# Allegro board PT8620_LTC2.brd
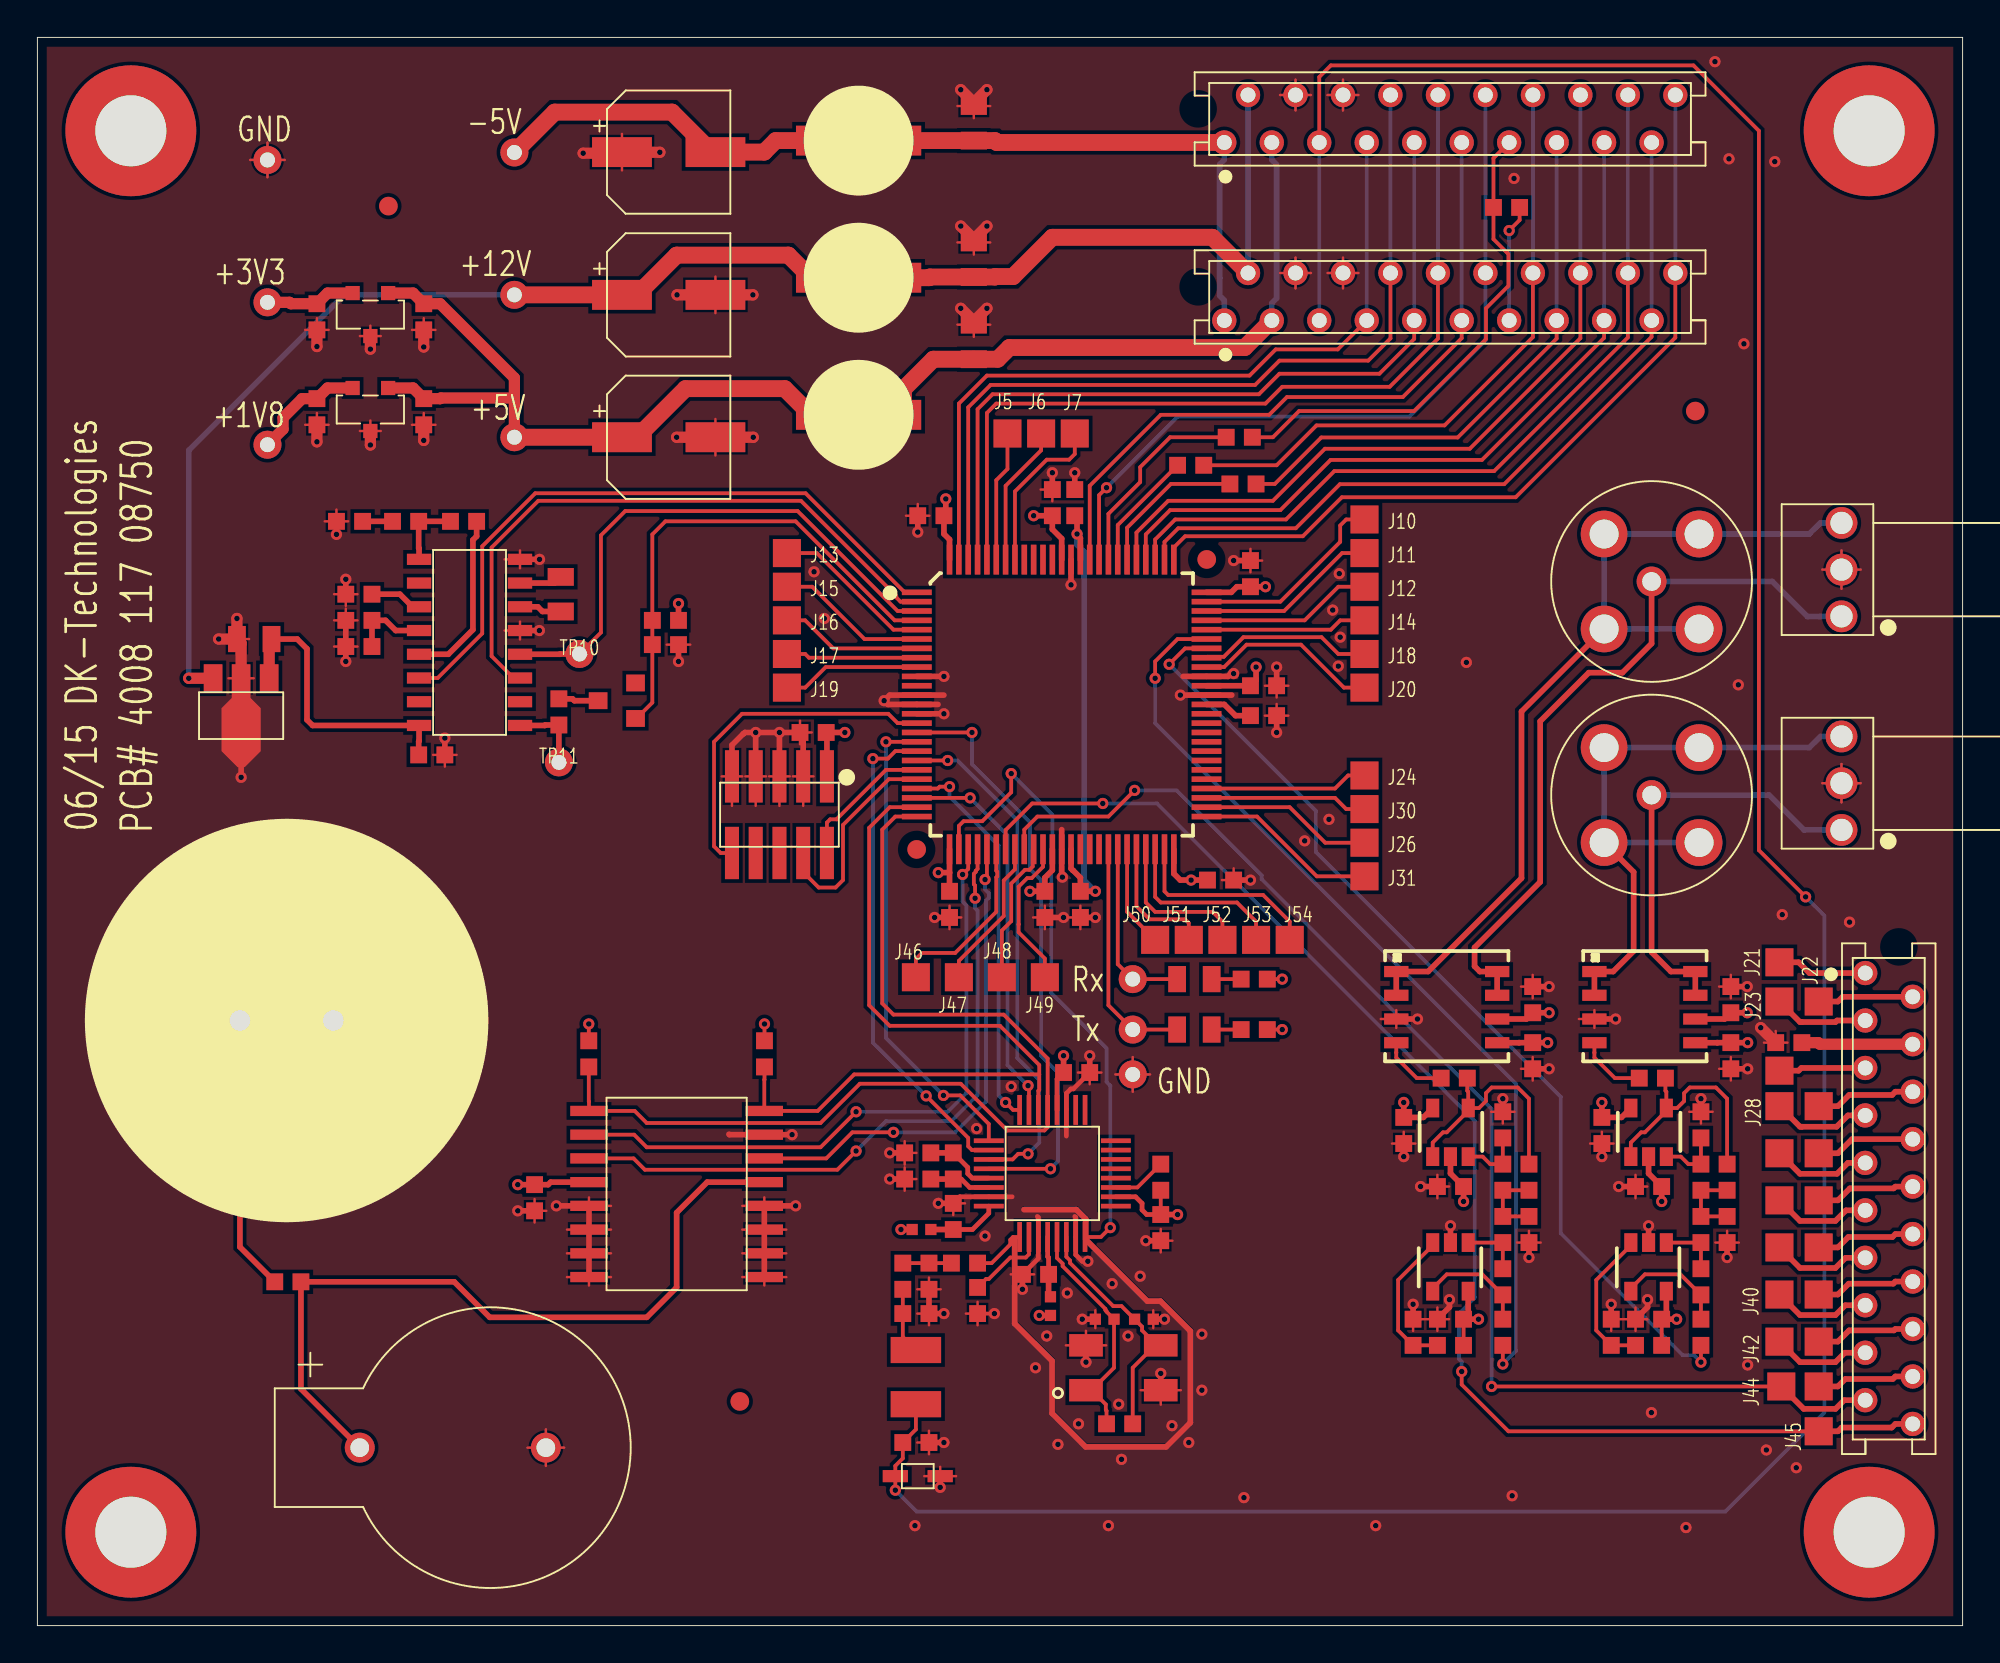
[diagram p0: board, top side]
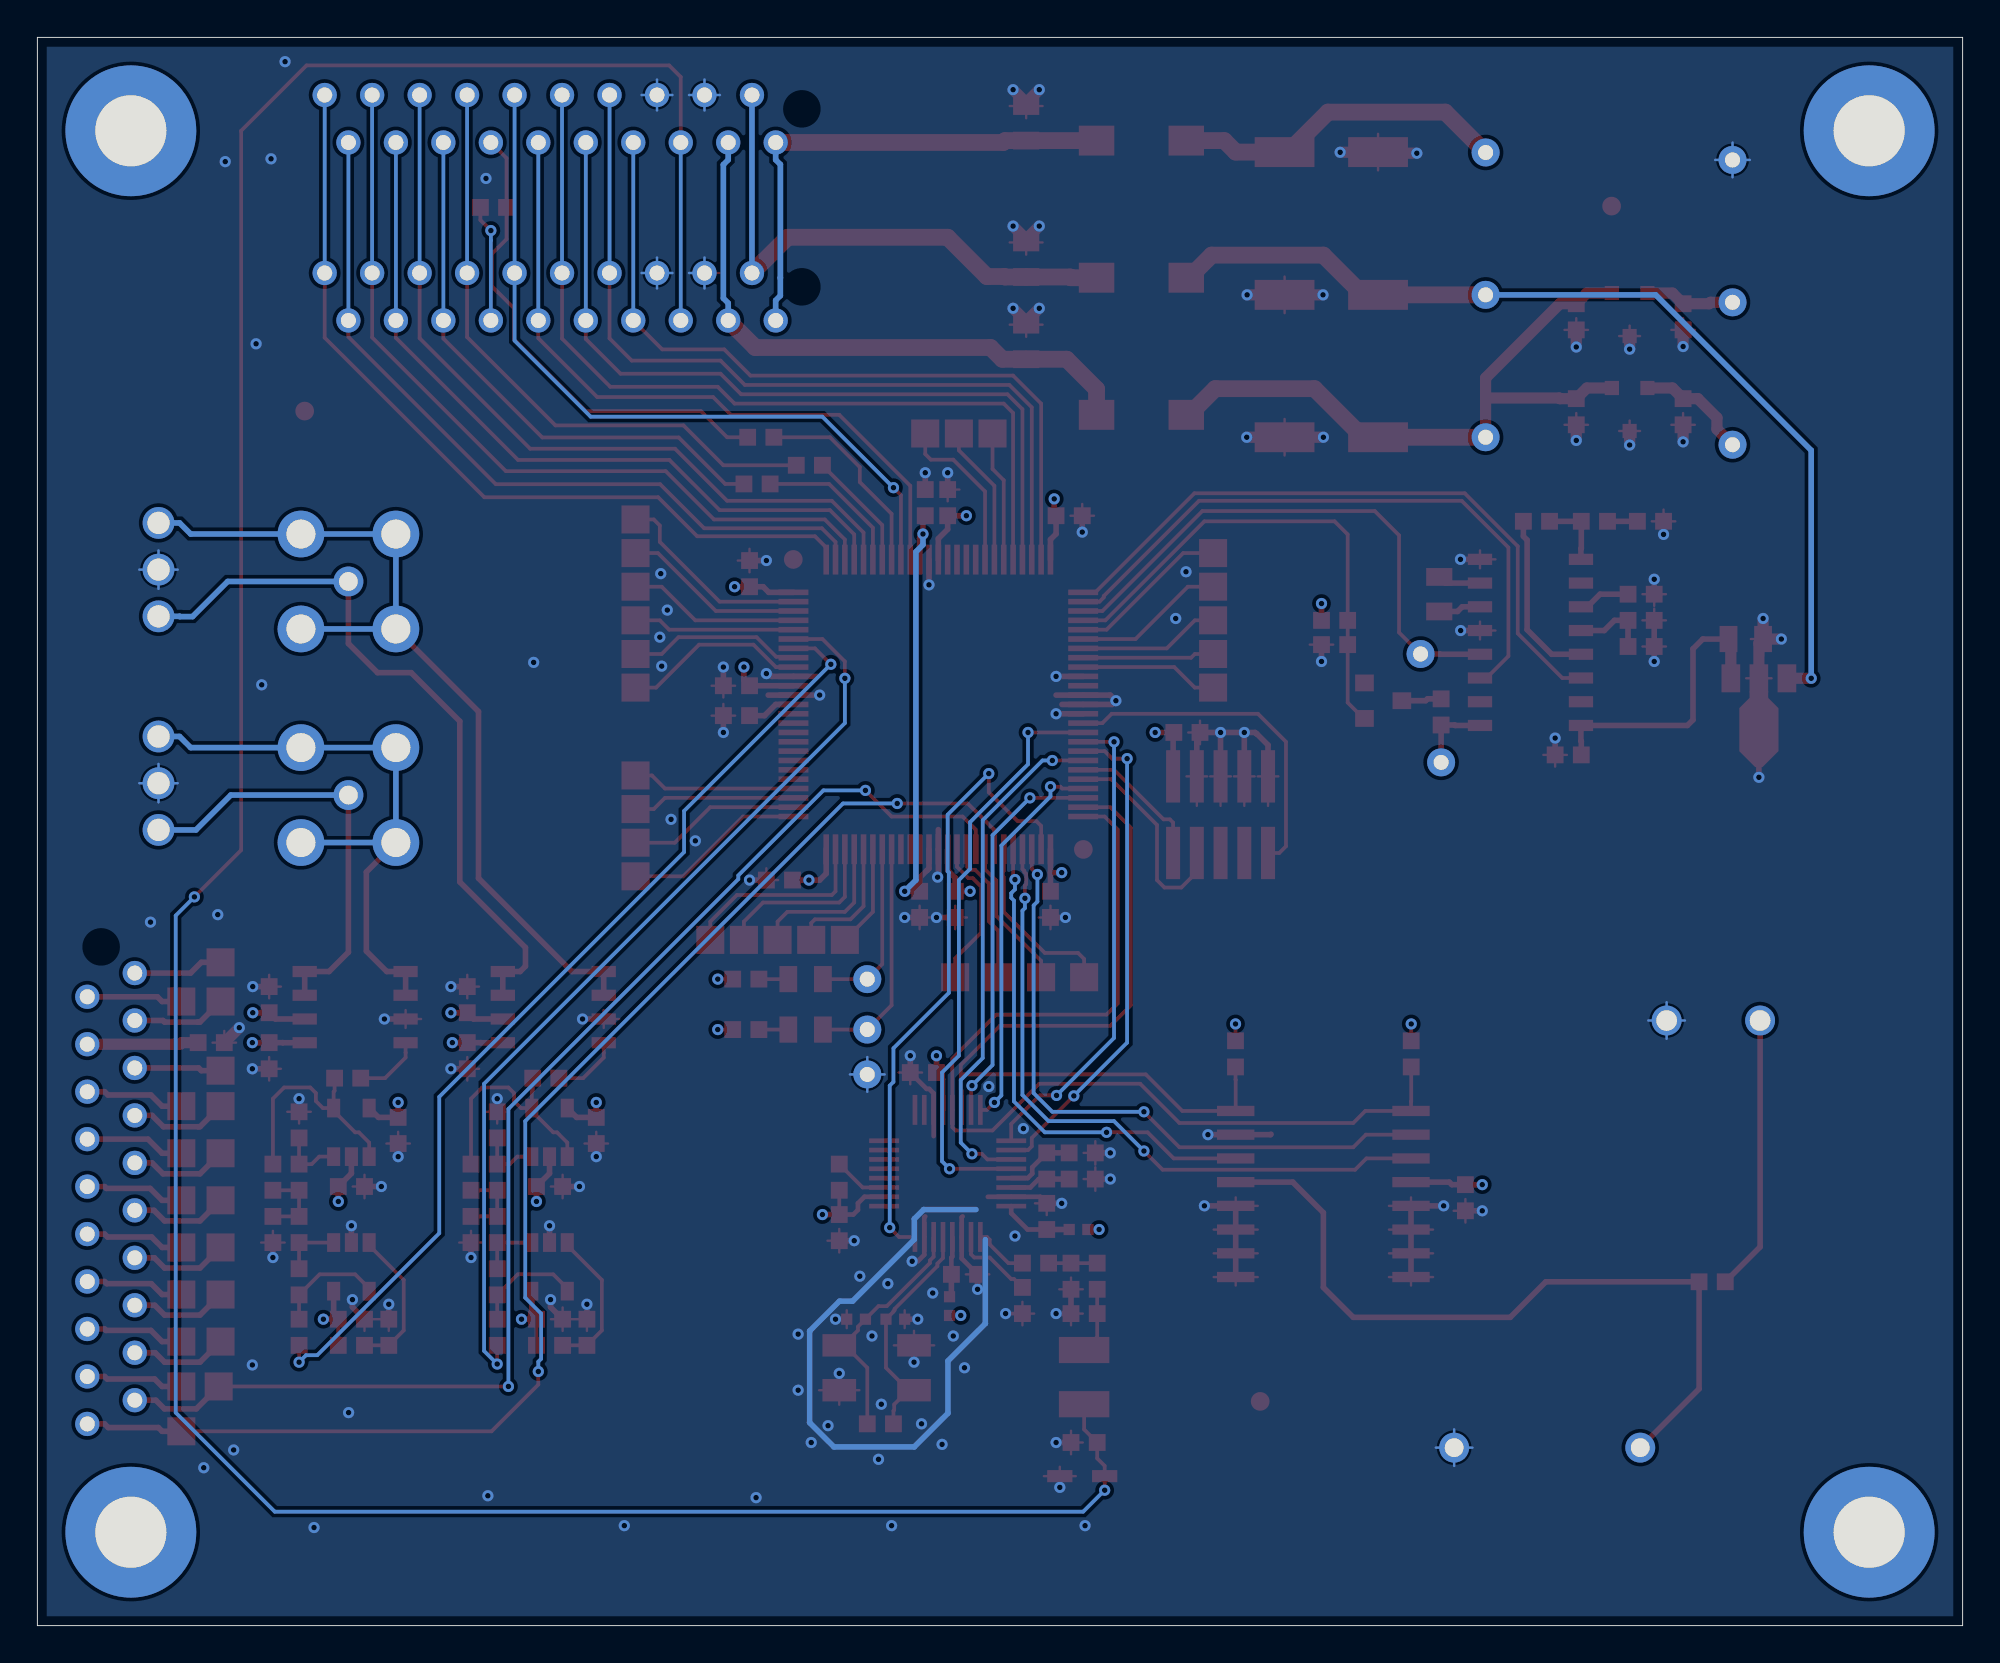
[diagram p1: board, bottom side, seen from below]

Outline 103 x 85 mm; copper layers: TOP, LAYER2, LAYER3, BOTTOM. Coordinates in mm from the lower left corner of the outline.
Outline path: 0,85 0,0 103,0 103,85 0,85

## Placement (name value [footprint] x y rotation side)
BT1  Batt Holder 12mm  [KEYSTONE500]  22.23 9.53 0 top
C1  1uF  [CC0603]  20.67 70.05 270 top
C2  1uF  [CC0603]  14.96 70.05 270 top
C3  1uF  [CC0603]  20.67 64.97 270 top
C4  1uF  [CC0603]  14.96 64.97 270 top
C5  100uF, 25V  [ECAP6X6_SIZED]  33.77 78.86 0 top
C6  100nF  [CC0805]  50.1 80.4 90 top
C7  100uF, 25V  [ECAP6X6_SIZED]  33.77 71.22 0 top
C8  100nF  [CC0805]  50.1 73.1 90 top
C9  100uF, 25V  [ECAP6X6_SIZED]  33.77 63.6 0 top
C10  100nF  [CC0805]  50.1 68.7 90 top
C11  1uF  [CC0603]  65.6 48.7 180 top
C12  1uF  [CC0603]  55.8 38.6 90 top
C13  100nF  [CC0603]  48.8 38.6 270 top
C14  100nF  [CC0603]  41.5 47.8 180 top
C15  100nF  [CC0603]  65.6 50.3 0 top
C16  100nF  [CC0603]  63.3 39.9 0 top
C17  100nF  [CC0603]  47.8 59.4 180 top
C18  100nF  [CC0603]  53.9 38.6 270 top
C19  100nF  [CC0603]  64.9 56.3 90 top
C20  100nF  [CC0603]  54.3 60.1 90 top
C21  10uF/10V_X7R  [CC0805]  11.6 52.8 180 top
C22  100nF  [CC0603]  21.1 46.6 180 top
C23  15nF/50V/5%  [CC0805]  28 55.2 270 top
C24  1uF  [CC0603]  16.7 59.1 0 top
C25  100nF  [CC0603]  33.6 52.5 180 top
C26  1nF  [CC0603]  79.8 24 90 top
C27  1uF  [CC0603]  75.8 29.3 0 top
C28  510pF  [CC0603]  78.4 26.8 90 top
C29  10nF/50V  [CC0603]  78.4 18.4 90 top
C30  100nF  [CC0603]  75.6 23.5 180 top
C31  100nF  [CC0603]  80 30.5 270 top
C32  100nF  [CC0603]  75.6 16.4 180 top
C33  100nF  [CC0603]  73.1 26.5 270 top
C34  100nF  [CC0603]  80 33.5 90 top
C35  1nF  [CC0603]  90.4 24 90 top
C36  1uF  [CC0603]  86.4 29.3 0 top
C37  510pF  [CC0603]  89 26.8 90 top
C38  10nF/50V  [CC0603]  89 18.4 90 top
C39  100nF  [CC0603]  90.6 30.5 270 top
C40  100nF  [CC0603]  86.2 23.5 180 top
C41  100nF  [CC0603]  86.2 16.4 180 top
C42  100nF  [CC0603]  90.6 33.5 90 top
C43  100nF  [CC0603]  83.7 26.5 270 top
C44  1F, 3.6V  [EECRG0V105H]  13.34 32.38 0 top
C45  100nF  [CC0603]  26.6 22.9 270 top
C46  1uF  [CC0603]  47.1 23.9 0 top
C47  1uF  [CC0603]  47.1 25.3 0 top
C48  1uF  [CC0603]  49 24.6 90 top
C49  100nF  [CC0603]  49.6 19.4 0 top
C50  180pF  [CC0603]  47 9.8 0 top
C51  180pF  [CC0603]  47 16.7 0 top
C52  100nF  [CC0603]  50.3 17.4 90 top
C53  12pF  [CC0402]  57.1 16.4 180 top
C54  12pF  [CC0402]  59.2 16.4 0 top
C55  100nF  [CC0603]  53.4 18.8 180 top
C56  100nF  [CC0603]  49 21.9 90 top
C57  100nF  [CC0603]  55.6 29.6 0 top
C58  100nF  [CC0603]  60.1 21.3 270 top
C59  100nF  [CC0603]  55.5 60.1 90 top
D1  RED LED  [LED_0805]  61.9 34.6 180 top
D2  BLUE LED  [LED_0805]  61.9 31.9 180 top
D3  HSMS-2800  [SOT23-1]  31 49.5 90 top
D4  5V, TVS  [SOD323_TVS]  47.1 8 180 top
FID1  1mm  [FIDUCIAL1_3]  37.58 12 0 top
FID2  1mm  [FIDUCIAL1_3]  18.78 75.97 0 top
FID3  1mm  [FIDUCIAL1_3]  88.7 65 0 top
J1  TE_9-215079-0  [TE_215079]  75.56 80.64 180 top
J2  TE_9-215079-0  [TE_215079]  75.56 71.12 180 top
J3  MCX_HS82_75Ohm  [MCX_ML15]  86.36 55.88 90 top
J4  Molex_5046  [MOLEX_5046_3P]  96.52 56.52 180 top
J5  pad1.5x1.5mm  [PAD150X150]  53.4 63.8 0 top
J6  pad1.5x1.5mm  [PAD150X150]  55.2 63.8 0 top
J7  pad1.5x1.5mm  [PAD150X150]  57 63.8 0 top
J8  MCX_HS82_75Ohm  [MCX_ML15]  86.36 44.45 0 top
J9  Molex_5046  [MOLEX_5046_3P]  96.52 45.09 180 top
J10  pad1.5x1.5mm  [PAD150X150]  72.5 59.2 0 top
J11  pad1.5x1.5mm  [PAD150X150]  72.5 57.4 0 top
J12  pad1.5x1.5mm  [PAD150X150]  72.5 55.6 0 top
J13  pad1.5x1.5mm  [PAD150X150]  41.6 57.4 0 top
J14  pad1.5x1.5mm  [PAD150X150]  72.5 53.8 0 top
J15  pad1.5x1.5mm  [PAD150X150]  41.6 55.6 0 top
J16  pad1.5x1.5mm  [PAD150X150]  41.6 53.8 0 top
J17  pad1.5x1.5mm  [PAD150X150]  41.6 52 0 top
J18  pad1.5x1.5mm  [PAD150X150]  72.5 52 0 top
J19  pad1.5x1.5mm  [PAD150X150]  41.6 50.2 0 top
J20  pad1.5x1.5mm  [PAD150X150]  72.5 50.2 0 top
J21  pad1.5x1.5mm  [PAD150X150]  94.7 35.5 0 top
J22  pad1.5x1.5mm  [PAD150X150]  96.8 33.4 0 top
J23  pad1.5x1.5mm  [PAD150X150]  94.7 33.4 0 top
J24  pad1.5x1.5mm  [PAD150X150]  72.5 45.5 0 top
J25  pad1.5x1.5mm  [PAD150X150]  94.7 29.7 0 top
J26  pad1.5x1.5mm  [PAD150X150]  72.5 41.9 0 top
J27  pad1.5x1.5mm  [PAD150X150]  96.8 27.8 0 top
J28  pad1.5x1.5mm  [PAD150X150]  94.7 27.8 0 top
J29  TE_9-215079-0  [TE_215079]  99.06 22.86 90 top
J30  pad1.5x1.5mm  [PAD150X150]  72.5 43.7 0 top
J31  pad1.5x1.5mm  [PAD150X150]  72.5 40.1 0 top
J32  pad1.5x1.5mm  [PAD150X150]  96.8 25.28 0 top
J33  pad1.5x1.5mm  [PAD150X150]  94.7 25.28 0 top
J34  pad1.5x1.5mm  [PAD150X150]  96.8 22.76 0 top
J35  pad1.5x1.5mm  [PAD150X150]  94.7 22.76 0 top
J36  FTSH-105-01-L-DV-K  [FTSH_2X5_SMD]  39.7 43.4 270 top
J37  pad1.5x1.5mm  [PAD150X150]  96.8 20.24 0 top
J38  pad1.5x1.5mm  [PAD150X150]  94.7 20.24 0 top
J39  pad1.5x1.5mm  [PAD150X150]  96.8 17.72 0 top
J40  pad1.5x1.5mm  [PAD150X150]  94.7 17.72 0 top
J41  pad1.5x1.5mm  [PAD150X150]  96.8 15.2 0 top
J42  pad1.5x1.5mm  [PAD150X150]  94.7 15.2 0 top
J43  pad1.5x1.5mm  [PAD150X150]  96.8 12.8 0 top
J44  pad1.5x1.5mm  [PAD150X150]  94.8 12.8 0 top
J45  pad1.5x1.5mm  [PAD150X150]  96.8 10.4 0 top
J46  pad1.5x1.5mm  [PAD150X150]  48.5 34.7 0 top
J47  pad1.5x1.5mm  [PAD150X150]  50.8 34.7 0 top
J48  pad1.5x1.5mm  [PAD150X150]  53.1 34.7 0 top
J49  pad1.5x1.5mm  [PAD150X150]  55.4 34.7 0 top
J50  pad1.5x1.5mm  [PAD150X150]  61.3 36.7 0 top
J51  pad1.5x1.5mm  [PAD150X150]  63.1 36.7 0 top
J52  pad1.5x1.5mm  [PAD150X150]  64.9 36.7 0 top
J53  pad1.5x1.5mm  [PAD150X150]  66.7 36.7 0 top
J54  pad1.5x1.5mm  [PAD150X150]  68.5 36.7 0 top
L1  2.7uH, 2.15A  [LQH55P_2220]  43.94 79.47 0 top
L2  2.7uH, 2.15A  [LQH55P_2220]  43.94 72.14 0 top
L3  2.7uH, 2.15A  [LQH55P_2220]  43.94 64.8 0 top
L4  2.7uH/0.29A  [CL1210]  47 13.3 90 top
L5  40R@100Mhz_0402  [CR0402]  47.3 21.2 0 top
L6  40R@100Mhz_0402  [CR0402]  54.2 17.1 90 top
PAD1  3.8mm  [HOLE_70P38]  5 5 0 top
PAD2  3.8mm  [HOLE_70P38]  98 5 0 top
PAD3  3.8mm  [HOLE_70P38]  98 80 0 top
PAD4  3.8mm  [HOLE_70P38]  5 80 0 top
R1  332R_1pct  [CR0603]  61.7 62.1 180 top
R2  332R_1pct  [CR0603]  64.5 61.1 180 top
R3  0R  [CR0603]  93.7 31.2 0 top
R4  2K26_1pct  [CR0603]  29.5 30.6 270 top
R5  2K26_1pct  [CR0603]  38.9 30.6 270 top
R6  475R_1pct  [CR0603]  65.1 34.6 0 top
R7  475R_1pct  [CR0603]  65.1 31.9 0 top
R8  47K5_1pct  [CR0603]  22.8 59.1 180 top
R9  100K_1pct  [CR0603]  19.7 59.1 180 top
R10  150K_1pct  [CR0603]  17.2 55.2 180 top
R11  475K_1pct  [CR0603]  17.2 52.4 180 top
R12  825K_1pct  [CR0603]  17.2 53.8 180 top
R13  4K75_1pct  [CR0603]  27.9 48.9 90 top
R14  1M00_1pct  [CR0603]  33.6 53.8 180 top
R15  4K70_1pct  [CR0603]  75.6 15 180 top
R16  4K70_1pct  [CR0603]  73.6 15.7 90 top
R17  1K82_1pct  [CR0603]  78.4 15.7 90 top
R18  10K0_1pct  [CR0603]  78.4 21.2 90 top
R19  10K0_1pct  [CR0603]  78.4 24 90 top
R20  4K70_1pct  [CR0603]  79.8 21.2 270 top
R21  4K70_1pct  [CR0603]  86.2 15 180 top
R22  4K70_1pct  [CR0603]  84.2 15.7 90 top
R23  1K82_1pct  [CR0603]  89 15.7 90 top
R24  10K0_1pct  [CR0603]  89 21.2 90 top
R25  10K0_1pct  [CR0603]  89 24 90 top
R26  4K70_1pct  [CR0603]  90.4 21.2 270 top
R27  0R  [CR0603]  13.4 18.4 180 top
R28  37R4_1pct  [CR0603]  46.3 18.7 90 top
R29  37R4_1pct  [CR0603]  47.7 18.7 90 top
R30  100K_1pct  [CR0603]  57.9 10.8 0 top
R31  10K0_1pct  [CR0603]  60.1 24 270 top
R32  N.M.  [CR0603]  78.6 75.9 180 top
R33  0R  [CR0603]  64.3 63.6 180 top
TP1  +12V  [TESTPOINT_PL080C150]  25.52 71.22 0 top
TP2  +5V  [TESTPOINT_PL080C150]  25.52 63.6 0 top
TP3  +3V3  [TESTPOINT_PL080C150]  12.31 70.82 0 top
TP4  +1V8  [TESTPOINT_PL080C150]  12.31 63.2 0 top
TP5  -5V  [TESTPOINT_PL080C150]  25.52 78.84 0 top
TP6  GND  [TESTPOINT_PL080C150]  12.31 78.44 0 top
TP7  Rx  [TESTPOINT_PL080C150]  58.6 34.6 0 top
TP8  GND  [TESTPOINT_PL080C150]  58.6 29.5 0 top
TP9  Tx  [TESTPOINT_PL080C150]  58.6 31.9 0 top
TP10  4kHz  [TESTPOINT_PL080C150]  29 52 180 top
TP11  LOCKED  [TESTPOINT_PL080C150]  27.9 46.2 180 top
U1  AP7333, 3.3V  [SOT-23-123]  18.77 71.31 180 top
U2  AP7333, 1.8V  [SOT-23-123]  18.77 66.23 180 top
U3  CY8C3866AXI-040  [TQFP50P1600X1600X160-100N]  54.8 49.3 0 top
U4  UA78L05  [SOT89_PK]  10.9 48.7 270 top
U5  74HC4046  [SOIC16_P127_990X390]  23.12 52.62 180 top
U6  TS951ILT  [SOT23-5]  75.6 19.2 180 top
U7  TS951ILT  [SOT23-5]  75.6 26.4 0 top
U8  DRV135  [SOIC8_P127_500X620]  75.4 33.1 270 top
U9  TS951ILT  [SOT23-5]  86.2 19.2 180 top
U10  TS951ILT  [SOT23-5]  86.2 26.4 0 top
U11  DRV135  [SOIC8_P127_500X620]  86 33.1 270 top
U12  DS1374  [SO16_P127_1030X750_2]  34.2 23.1 0 top
U13  TVP5150  [TQFP32_P050_700X700]  54.3 24.2 90 top
X1  QC5A14.31818F12B12  [XTAL_SMD4_P400_500X320]  58.1 13.8 0 top

## Library data of the parts
BT1 = BATTERY_COIN
C1-C4 C6 C8 C10-C43 C45-C59 = KOND
C5 C7 C9 C44 = CAP POL
D1 D2 = LED_0
D3 = DIODE_3
D4 = TVS
FID1-FID3 = FID
J1 J2 J29 = CON20
J3 J8 = BNC_0
J4 J9 = CON3
J5-J7 J10-J28 J30-J35 J37-J54 = CON1_0: room: AESIN2
J36 = CON2X5
L1-L3 = INDUCTOR
L4 = SPOLE
L5 L6 = RF_IND_1: room: ANALOG_AUDIO
PAD1-PAD4 = PAD
R1-R33 = RES
TP1-TP11 = TEST POINT: room: POWER_3V3
U1 U2 = AP7333
U3 = CY8C3866AXI-040
U4 = UA78LXX
U5 = 74HC4046A
U6 U7 U9 U10 = OPAMP_SOT23_1
U8 U11 = DRV135UA
U12 = DS1374C
U13 = TVP5150
X1 = XTAL_4S

## Footprints (pads in the part's own frame, mm; a bottom-side part is the same pattern mirrored in y, then rotated)
CC0402
  rect 0.6x0.6 smd: 1(-0.5,0) 2(0.5,0)
CC0603
  rect 0.9x0.9 smd: 1(-0.7,0) 2(0.7,0)
CC0805
  rect 0.95x1.4 smd: 1(-0.925,0) 2(0.925,0)
CL1210
  rect 1.4x2.7 smd: 1(-1.45,0) 2(1.45,0)
CR0402
  rect 0.6x0.6 smd: 1(-0.5,0) 2(0.5,0)
CR0603
  rect 0.9x0.9 smd: 1(-0.7,0) 2(0.7,0)
ECAP6X6_SIZED
  rect 3.2x1.6 smd: 1(-2.5,0) 2(2.5,0)
EECRG0V105H
  round 1.6 hole 1.1: 1(-2.5,0) 2(2.5,0)
FIDUCIAL1_3
  round 1 smd: 1(0,0)
FTSH_2X5_SMD
  rect 2.8x0.75 smd: 1(-2.05,2.54) 2(2.05,2.54) 3(-2.05,1.27) 4(2.05,1.27) 5(-2.05,0) 6(2.05,0) 7(-2.05,-1.27) 8(2.05,-1.27) 9(-2.05,-2.54) 10(2.05,-2.54)
HOLE_70P38
  round 7 hole 3.8: 1(0,0)
KEYSTONE500
  round 1.6 hole 1: 1(-4.978,0) 2(4.978,0)
LED_0805
  rect 0.95x1.4 smd: A(-0.925,0) C(0.925,0)
LQH55P_2220
  rect 1.9x1.6 smd: 1(-2.4,0) 2(2.4,0)
MCX_ML15
  round 1.6 hole 1: 1(0,0)
  round 2.5 hole 1.55: 2(2.54,2.54) 3(-2.54,2.54) 4(-2.54,-2.54) 5(2.54,-2.54)
MOLEX_5046_3P
  round 1.7 hole 1.19: 1(0,2.5) 2(0,0) 3(0,-2.5)
PAD150X150
  rect 1.5x1.5 smd: 1(-1.5,0)
SO16_P127_1030X750_2
  rect 2x0.55 smd: 1(-4.69,4.445) 2(-4.69,3.175) 3(-4.69,1.905) 4(-4.69,0.635) 5(-4.69,-0.635) 6(-4.69,-1.905) 7(-4.69,-3.175) 8(-4.69,-4.445) 9(4.69,-4.445) 10(4.69,-3.175) 11(4.69,-1.905) 12(4.69,-0.635) 13(4.69,0.635) 14(4.69,1.905) 15(4.69,3.175) 16(4.69,4.445)
SOD323_TVS
  rect 1.35x0.65 smd: 1(-1.2,0) 2(1.2,0)
SOIC8_P127_500X620
  rect 0.6x1.3 smd: 1(-1.905,-2.699) 2(-0.635,-2.699) 3(0.635,-2.699) 4(1.905,-2.699) 5(1.905,2.699) 6(0.635,2.699) 7(-0.635,2.699) 8(-1.905,2.699)
SOIC16_P127_990X390
  rect 1.3x0.6 smd: 1(-2.7,4.445) 2(-2.7,3.175) 3(-2.7,1.905) 4(-2.7,0.635) 5(-2.7,-0.635) 6(-2.7,-1.905) 7(-2.7,-3.175) 8(-2.7,-4.445) 9(2.7,-4.445) 10(2.7,-3.175) 11(2.7,-1.905) 12(2.7,-0.635) 13(2.7,0.635) 14(2.7,1.905) 15(2.7,3.175) 16(2.7,4.445)
SOT23-1
  rect 0.9x1 smd: 1(-0.95,-1) 2(0.95,-1) 3(0,1)
SOT23-5
  rect 0.7x1 smd: 1(-0.95,-1.3) 2(0,-1.3) 3(0.95,-1.3) 4(0.95,1.3) 5(-0.95,1.3)
SOT89_PK
  rect 1.5x1 smd: 1(-2,1.5) 2(-2,0) 3(-2,-1.5)
SOT-23-123
  rect 0.76x0.76 smd: 1(0,0) 2(1.9,0) 3(0.95,2.3)
TE_215079
  round 0 hole 1.6 unplated: (13.465,-0.53)
  round 1.3 hole 0.8: 1(12.065,1.27) 2(10.795,-1.27) 3(9.525,1.27) 4(8.255,-1.27) 5(6.985,1.27) 6(5.715,-1.27) 7(4.445,1.27) 8(3.175,-1.27) 9(1.905,1.27) 10(0.635,-1.27) 11(-0.635,1.27) 12(-1.905,-1.27) 13(-3.175,1.27) 14(-4.445,-1.27) 15(-5.715,1.27) 16(-6.985,-1.27) 17(-8.255,1.27) 18(-9.525,-1.27) 19(-10.795,1.27) 20(-12.065,-1.27)
TESTPOINT_PL080C150
  round 1.5 hole 0.8: 1(0,0)
TQFP32_P050_700X700
  rect 1.6x0.25 smd: 1(-3.4,1.75) 2(-3.4,1.25) 3(-3.4,0.75) 4(-3.4,0.25) 5(-3.4,-0.25) 6(-3.4,-0.75) 7(-3.4,-1.25) 8(-3.4,-1.75) 17(3.4,-1.75) 18(3.4,-1.25) 19(3.4,-0.75) 20(3.4,-0.25) 21(3.4,0.25) 22(3.4,0.75) 23(3.4,1.25) 24(3.4,1.75)
  rect 0.25x1.6 smd: 9(-1.75,-3.4) 10(-1.25,-3.4) 11(-0.75,-3.4) 12(-0.25,-3.4) 13(0.25,-3.4) 14(0.75,-3.4) 15(1.25,-3.4) 16(1.75,-3.4) 25(1.75,3.4) 26(1.25,3.4) 27(0.75,3.4) 28(0.25,3.4) 29(-0.25,3.4) 30(-0.75,3.4) 31(-1.25,3.4) 32(-1.75,3.4)
TQFP50P1600X1600X160-100N
  round 1 smd: (-7.76,-7.76) (7.76,7.76)
  rect 1.6x0.3 smd: 1(-7.75,6) 2(-7.75,5.5) 3(-7.75,5) 4(-7.75,4.5) 5(-7.75,4) 6(-7.75,3.5) 7(-7.75,3) 8(-7.75,2.5) 9(-7.75,2) 10(-7.75,1.5) 11(-7.75,1) 12(-7.75,0.5) 13(-7.75,0) 14(-7.75,-0.5) 15(-7.75,-1) 16(-7.75,-1.5) 17(-7.75,-2) 18(-7.75,-2.5) 19(-7.75,-3) 20(-7.75,-3.5) 21(-7.75,-4) 22(-7.75,-4.5) 23(-7.75,-5) 24(-7.75,-5.5) 25(-7.75,-6) 51(7.75,-6) 52(7.75,-5.5) 53(7.75,-5) 54(7.75,-4.5) 55(7.75,-4) 56(7.75,-3.5) 57(7.75,-3) 58(7.75,-2.5) 59(7.75,-2) 60(7.75,-1.5) 61(7.75,-1) 62(7.75,-0.5) 63(7.75,0) 64(7.75,0.5) 65(7.75,1) 66(7.75,1.5) 67(7.75,2) 68(7.75,2.5) 69(7.75,3) 70(7.75,3.5) 71(7.75,4) 72(7.75,4.5) 73(7.75,5) 74(7.75,5.5) 75(7.75,6)
  rect 0.3x1.6 smd: 26(-6,-7.75) 27(-5.5,-7.75) 28(-5,-7.75) 29(-4.5,-7.75) 30(-4,-7.75) 31(-3.5,-7.75) 32(-3,-7.75) 33(-2.5,-7.75) 34(-2,-7.75) 35(-1.5,-7.75) 36(-1,-7.75) 37(-0.5,-7.75) 38(0,-7.75) 39(0.5,-7.75) 40(1,-7.75) 41(1.5,-7.75) 42(2,-7.75) 43(2.5,-7.75) 44(3,-7.75) 45(3.5,-7.75) 46(4,-7.75) 47(4.5,-7.75) 48(5,-7.75) 49(5.5,-7.75) 50(6,-7.75) 76(6,7.75) 77(5.5,7.75) 78(5,7.75) 79(4.5,7.75) 80(4,7.75) 81(3.5,7.75) 82(3,7.75) 83(2.5,7.75) 84(2,7.75) 85(1.5,7.75) 86(1,7.75) 87(0.5,7.75) 88(0,7.75) 89(-0.5,7.75) 90(-1,7.75) 91(-1.5,7.75) 92(-2,7.75) 93(-2.5,7.75) 94(-3,7.75) 95(-3.5,7.75) 96(-4,7.75) 97(-4.5,7.75) 98(-5,7.75) 99(-5.5,7.75) 100(-6,7.75)
XTAL_SMD4_P400_500X320
  rect 1.8x1.2 smd: 1(-2,-1.2) 2(2,-1.2) 3(2,1.2) 4(-2,1.2)

## Nets
+1V8: C4.1 L5.1 L6.1 TP4.1 U2.2(VO)
+3V3: C2.1 C13.1 C14.1 C45.1 C57.1 C58.1 J36.1 R4.1 R5.1 R31.2 TP3.1 U1.2(VO) U3.26(VDDIO1) U12.4(VCC) U13.10(IO_DVDD) U13.20(DVDD)
+5V: C1.1 C3.1 C9.1 C15.1 C16.1 C17.1 C18.1 C19.1 C20.1 C32.1 C33.1 C34.1 C41.1 C42.1 C43.1 L3.1 R6.2 R7.2 R14.1 R15.1 R21.1 TP2.1 U1.1(VI) U2.1(VI) U3.37(VDDD_1) U3.50(VDDIO3) U3.65(VDDA) U3.75(VDDIO0) U3.88(VDDD_2) U3.100(VDDIO2) U6.5(VCC) U7.5(VCC) U8.6(V+) U9.5(VCC) U10.5(VCC) U11.6(V+)
+12V: C7.1 L2.1 TP1.1 U4.3(VI)
-5V: C5.2 C30.1 C31.1 C39.1 C40.1 L1.1 TP5.1 U7.2(VDD) U8.5(V-) U10.2(VDD) U11.5(V-)
GND: BT1.2(ANODE) C1.2 C2.2 C3.2 C4.2 C5.1 C6.2 C7.2 C8.2 C9.2 C10.2 C11.1 C12.1 C13.2 C14.2 C15.2 C16.2 C17.2 C18.2 C19.2 C20.2 C21.2 C22.1 C24.1 C25.1 C28.2 C30.2 C31.2 C32.2 C33.2 C34.2 C37.2 C39.2 C40.2 C41.2 C42.2 C43.2 C44.2 C45.2 C46.1 C47.1 C50.2 C51.2 C52.1 C53.2 C54.2 C55.2 C56.2 C57.2 C58.2 C59.2 D4.1 J1.4 J1.6 J2.4 J2.6 J4.2 J9.2 J36.3 J36.5 J36.7 J36.9 R3.1 R10.2 R11.2 R12.2 R16.2 R20.2 R22.2 R26.2 R29.1 TP6.1 TP8.1 U1.3(GND) U2.3(GND) U3.10(VSSB) U3.12(VBOOST) U3.13(VBAT) U3.14(VSSD_1) U3.38(VSSD_2) U3.64(VSSA) U3.66(VSSD_3) U3.87(VSSD_4) U4.2(GND) U5.5(INH) U5.8(GND) U6.2(VDD) U8.3(GND) U9.2(VDD) U11.3(GND) U12.5(NC1) U12.6(NC2) U12.7(NC3) U12.8(NC4) U12.9(NC8) U12.10(NC7) U12.11(NC6) U12.12(NC5) U12.15(GND) U13.3(PLL_AGND) U13.7(AGND) U13.19(DGND) U13.31(CH_AGND) X1.2(GND1) X1.4(GND2)
VCCD: C12.2 C59.1 U3.39(VCCD_1) U3.86(VCCD_2)
CH_AVDD: C56.1 L5.2 U13.32(CH_AVDD)
F4_M: J1.12 J2.12 U3.84(P4_6_GPIO)
F8_G: J1.11 J2.11 U3.85(P4_7_GPIO)
FF_G: J1.9 J2.9 U3.97(P2_2_GPIO)
FF_M: J1.10 J2.10 U3.96(P2_1_GPIO)
FH_G: J1.7 J2.7 U3.99(P2_4_GPIO)
FH_M: J1.8 J2.8 U3.98(P2_3_GPIO)
GEN_VIDEO: C50.1 D4.2 J1.5 J2.5 L4.1
GPS_GND: J29.4 R3.2
GPS_LOCK_STAT: J29.18 J43.1
GPS_PPS: J29.19 J44.1 U3.34(GPIO_P5_7)
GPS_REQ: J29.17 J42.1
GPS_SCL: J29.14 J39.1
GPS_SDA: J29.15 J40.1
GPS_TX: J29.20 J45.1 U3.32(GPIO_P5_5)
N16724867_LTC_DRV1: C26.2 C27.2 U7.1(OUT) U7.4(IN-)
N16724867_LTC_DRV3: C35.2 C36.2 U10.1(OUT) U10.4(IN-)
N16724877_LTC_DRV1: C27.1 U8.4(VIN)
N16724877_LTC_DRV3: C36.1 U11.4(VIN)
N16725257_LTC_DRV1: C28.1 R19.2 U7.3(IN+)
N16725257_LTC_DRV3: C37.1 R25.2 U10.3(IN+)
N16725561_LTC_DRV1: C26.1 R18.2 R19.1 R20.1
N16725561_LTC_DRV3: C35.1 R24.2 R25.1 R26.1
N16726085_LTC_DRV1: C29.2 R18.1 U6.1(OUT)
N16726085_LTC_DRV3: C38.2 R24.1 U9.1(OUT)
N16726903_LTC_DRV1: C29.1 R17.2 U6.4(IN-)
N16726903_LTC_DRV3: C38.1 R23.2 U9.4(IN-)
N16727359_LTC_DRV1: R15.2 R16.1 U6.3(IN+)
N16727359_LTC_DRV3: R21.2 R22.1 U9.3(IN+)
NMRES: J1.16 J2.16 U3.80(P4_2_GPIO)
PLL_AVDD: C55.1 L6.2 U13.4(PLL_AVDD)
SCL1: J1.14 J2.14 R1.1
SDA1: J1.15 J2.15 R2.1
TCK: J1.19 J2.19 U3.77(P0_5_GPIO_OPAMP2-)
TCODECLK: J1.13 R32.2 R33.1
TDI: J1.17 J2.17 U3.79(P0_7_GPIO_IDAC2)
TDO: J1.20 J2.20 U3.76(P0_4_GPIO_OPAMP2+)
TMS0: J1.18 J2.18 U3.78(P0_6_GPIO_IDAC0)
XK1+5V: C10.1 J1.3 J2.3 L3.2
XK1+12V: C8.1 J1.2 J2.2 L2.2
XK1-5V: C6.1 J1.1 J2.1 L1.2
N06092: J3.2 J3.3 J3.4 J3.5 J4.3 U8.1(-VO) U8.2(-S)
N06162: J3.1(CENTER) J4.1 U8.7(+S) U8.8(+VO)
N06285: J8.2 J8.3 J8.4 J8.5 J9.3 U11.1(-VO) U11.2(-S)
N06301: J8.1(CENTER) J9.1 U11.7(+S) U11.8(+VO)
N07596: U3.1(GPIO_P2_5) U5.14(SIGN IN)
N07608: U3.2(GPIO_P2_6) U5.3(COMP IN)
N07620: TP10.1 U3.3(GPIO_P2_7) U5.4(VCO OUT)
N07632: C25.2 D3.1(A) R14.2 U3.4(I2C0_SCL_SIO_P12_4)
N07789: U3.16(GPIO_P5_0) U13.28(PDN)
N07795: U3.17(GPIO_P5_1) U13.25(HSYNC)
N07807: U3.18(GPIO_P5_2) U13.26(AVID)
N07819: U3.19(GPIO_P5_3) U13.27(INTREQ/GPCL/VBLK)
N07831: U3.22(CONFIGURABLE_X\R\E\S\_GPIO_P1_2) U13.24(VSYNC/PALI)
N07843: U3.23(TDO_SWV_GPIO_P1_3) U13.23(FID/GLCO)
N07855: R5.2 U3.24(TDI_GPIO_P1_4) U12.16(SDA) U13.22(SDA)
N07859: R4.2 U3.25(NTRST_GPIO_P1_5) U12.1(SCL) U13.21(SCL)
N07863: U3.27(GPIO_P1_6) U13.8(RESETB)
N08147: J36.2 U3.20(TMS_SWDIO_GPIO_P1_0)
N08159: J36.4 U3.21(TCK_SWDCK_GPIO_P1_1)
N08171: J36.10 U3.15(X\R\E\S\)
N09025: U3.28(GPIO_P1_7) U12.2(\\I\N\T)
N09032: U3.29(SIO_P12_6) U12.3(SQW)
N09039: U3.30(SIO_P12_7) U12.14(\\R\S\T)
N12453: D1.A(ANODE) R6.1
N12457: D2.A(ANODE) R7.1
N12461: D1.C(CATHODE) TP7.1 U3.44(IDAC1_GPIO_P3_0)
N12468: D2.C(CATHODE) TP9.1 U3.43(MHZ XTAL_XI_GPIO_P15_1)
N12607: R17.1 U3.70(P4_1_GPIO)
N12619: R23.1 U3.69(P4_0_GPIO)
N20020: R1.2 U3.82(P4_4_GPIO)
N20024: R2.2 U3.81(P4_3_GPIO)
N16722215: C21.1 C22.2 U4.1(VO) U5.16(VDD)
N16722960: C47.2 C48.2 U13.29(REFP)
N16722974: C46.2 C48.1 U13.30(REFM)
N16723190: R31.1 U13.11(YOUT7/I2CSEL)
N16723966: C54.1 R30.2 U13.6(XTAL2) X1.3(X2)
N16724164: C44.1 R27.2
N16724170: BT1.1(CATHODE) R27.1 U12.13(VBACKUP)
N16724335: C53.1 R30.1 U13.5(XTAL1/OSC_IN) X1.1(X1)
N16724829: R13.1 TP11.1 U5.1(PH PULSES)
N16724836: D3.3(K) R13.2
N16724852: C24.2 R9.2
N16724946: R8.1 U5.13(COMP2)
N16724960: R8.2 R9.1 U5.9(VCO IN)
N16724992: C23.2 U5.6(CA)
N16725000: C23.1 U5.7(CB)
N16725051: C52.2 U13.2(AIP1B)
N16725076: C49.2 U13.1(AIP1A)
N16725089: R11.1 R12.1 U5.12(R2)
N16725105: R10.1 U5.11(R1)
N16725283: C49.1 R28.2 R29.2
N16725403: C51.1 L4.2 R28.1
N16727182: C11.2 U3.63(VCCA)
N16727279: J29.16 J41.1
N16730628: J29.13 J38.1
N16730630: J29.8 J32.1
N16730632: J29.12 J37.1
N16730634: J29.11 J35.1
N16730636: J28.1 J29.7
N16730638: J27.1 J29.6
N16730640: J29.10 J34.1
N16730642: J25.1 J29.5
N16730644: J29.9 J33.1
N16730664: J21.1 J29.1
N16730666: J22.1 J29.2
N16730668: J23.1 J29.3
N16731426: J31.1 U3.51(P3_6_GPIO_OPAMP1OUT)
N16731428: J30.1 U3.53(P12_0_SIO_I2C1_SCL)
N16731430: J26.1 U3.52(P3_7_GPIO_OPAMP3OUT)
N16731432: J24.1 U3.54(P12_1_SIO_I2C1_SDA)
N16731538: J14.1 U3.71(P0_0_GPIO_OPAMP2OUT)
N16731540: J12.1 U3.72(P0_1_GPIO_OPAMP0OUT)
N16731542: J11.1 U3.73(P0_2_GPIO_OPAMP0+)
N16731544: J10.1 U3.74(P0_3_GPIO_OPAMP0-_EXTREF0)
N16731602: J18.1 U3.68(P12_3_SIO)
N16731606: J20.1 U3.67(P12_2_SIO)
N16731796: J16.1 U3.7(GPIO_P6_5)
N16731798: J13.1 U3.5(I2C0_SDA_SIO_P12_5)
N16731800: J17.1 U3.8(GPIO_P6_6)
N16731802: J15.1 U3.6(GPIO_P6_4)
N16731804: J19.1 U3.9(GPIO_P6_7)
N16731818: J46.1 U3.31(GPIO_P5_4)
N16732022: J53.1 U3.48(OPAMP1-_GPIO_P3_4)
N16732024: J51.1 U3.46(OPAMP3-_EXTREF1_GPIO_P3_2)
N16732026: J54.1 U3.49(OPAMP1+_GPIO_P3_5)
N16732028: J52.1 U3.47(OPAMP3+_GPIO_P3_3)
N16732030: J50.1 U3.45(IDAC3_GPIO_P3_1)
N16732201: J47.1 U3.33(GPIO_P5_6)
N16732205: J48.1 U3.35(USBIO_D+_SWDIO_P15_6)
N16732209: J49.1 U3.36(USBIO_D-_SWDCK_P15_7)
N16736296: J6.1 U3.94(P15_5_GPIO)
N16736298: J7.1 U3.93(P15_4_GPIO)
N16736300: J5.1 U3.95(P2_0_GPIO)
N16744351: J2.13 R32.1
N16744938: R33.2 U3.83(P4_5_GPIO)

Pads without a net: D3 2; FID1 1; FID2 1; FID3 1; J36 6 8; PAD1 1; PAD2 1; PAD3 1; PAD4 1; U3 11 40 41 42 55 56 57 58 59 60 61 62 89 90 91 92; U5 2 10 15; U13 9 12 13 14 15 16 17 18

## Via types
v1: diameter 0.6, hole 0.3, TOP to BOTTOM, 194 vias

## Routing (per net, layer and track width the routed paths; a pad name or vN(x,y) marks a point on that pad's centre or on a via; arc(x,y) is an arc through that point)
+1V8: length 101.1
  TOP w0.3: L5.1 v1(46.2,21.2) ; L6.1 v1(53.6,16.6)
  TOP w0.6: TP4.1 13.14,64.03 13.14,64.64 14.16,65.67 C4.1 15.53,66.23 16.86,66.23
  LAYER3 w0.127: 11.38,63.2 TP4.1 ; TP4.1 13.24,63.2 ; TP4.1 12.31,64.13
  LAYER3 w0.9: TP4.1 12.31,41.99 22.5,31.8 22.5,18.3 25.9,14.9 39.9,14.9 v1(46.2,21.2) 46.2,16.1 47.9,14.4 51.4,14.4 v1(53.6,16.6)
+3V3: length 140.2
  TOP w0.2: R31.2 C58.1 ; R5.1 v1(38.9,32.2) ; R4.1 v1(29.5,32.2)
  TOP w0.25: C58.1 59.35,22 59.1,22.25 59.1,22.6 58.75,22.95 U13.10 ; U13.20 54.55,29.25 C57.1
  TOP w0.3: C57.1 v1(54.9,30.5) ; v1(43.2,47.8) C14.1 42.24,47.76 J36.1 ; 48.8,40.3 v1(48.2,40.3) ; 48.8,40.3 U3.26 ; 48.8,40.3 C13.1 ; C58.1 v1(61,22) ; v1(25.7,23.6) C45.1 27.33,23.6 27.46,23.73 U12.4
  TOP w0.6: 16.86,71.31 15.53,71.31 C2.1 13.56,70.75 13.49,70.82 TP3.1
  LAYER3 w0.127: 11.38,70.82 TP3.1 ; TP3.1 12.31,71.75 ; TP3.1 13.24,70.82 ; TP3.1 12.31,69.89
  LAYER3 w0.9: 46.2,34.7 50.4,30.5 v1(54.9,30.5) 54.9,28.1 v1(61,22) ; 46.2,34.7 46.2,38.3 v1(48.2,40.3) 43.2,45.3 v1(43.2,47.8) 41.1,49.9 25.6,49.9 24.7,50.8 24.7,53.9 19.2,59.4 19.2,63.9 16.6,66.5 14.4,66.5 13.5,67.4 13.5,69.63 TP3.1 ; 46.2,34.7 43.7,32.2 v1(38.9,32.2) v1(29.5,32.2) 25.7,28.4 v1(25.7,23.6)
+5V: length 241.1
  TOP w0.2: R6.2 v1(66.6,34.6) ; R21.1 C41.1 ; R15.1 C32.1 ; R7.2 v1(66.6,31.9)
  TOP w0.3: U10.5 84.75,27.2 C43.1 v1(83.7,28) ; v1(65.7,55.6) C19.1 64.17,55.6 63.87,55.3 U3.75 ; v1(73.1,28) C33.1 74.15,27.2 U7.5 ; U3.100 48.8,58.13 48.5,58.43 C17.1 48.6,59.5 v1(48.6,60.3) ; R14.1 v1(34.3,54.7) ; U9.5 87.15,16.65 C41.1 v1(87.7,16.4) ; U11.6 90.27,32.47 C42.1 v1(91.48,32.8) ; U3.65 C15.1 65.2,50.6 v1(65.2,51.3) ; U3.37 54.3,40.43 53.9,40.03 C18.1 v1(53.1,39.3) ; v1(53.3,59.4) C20.1 54.3,58.67 54.8,58.17 U3.88 ; U3.50 60.8,40.25 61.15,39.9 v1(61.72,39.9) C16.1 ; U8.6 79.67,32.47 C34.1 v1(80.88,32.8) ; U6.5 76.55,16.65 C32.1 v1(77.1,16.4)
  TOP w0.6: U2.1 20.1,66.23 C3.1 21.55,65.67 21.58,65.7 25.52,65.7 ; U1.1 20.1,71.31 C1.1 21.55,70.75 25.52,66.77 25.52,65.7 ; 25.52,65.7 TP2.1
  TOP w0.9: TP2.1 C9.1 32.08,63.6 34.67,66.2 39.98,66.2 41.38,64.8 L3.1
  LAYER3 w0.127: TP2.1 26.45,63.6 ; TP2.1 25.52,62.67 ; TP2.1 25.52,64.53 ; TP2.1 24.59,63.6
  LAYER3 w0.9: 92.77,33.13 93.15,32.75 93.15,31.61 92.9,31.36 92.9,28.6 88.1,23.8 88.1,17.68 87.7,17.28 ; 60.02,41.6 60.02,43.72 65.2,48.9 v1(65.2,51.3) 65.2,54.22 65.7,54.72 v1(65.7,55.6) 57.1,55.6 v1(53.3,59.4) 49.5,59.4 v1(48.6,60.3) 39.9,60.3 v1(34.3,54.7) 33.68,55.32 33.68,55.44 TP2.1 ; 60.02,41.6 54.4,41.6 53.1,40.3 v1(53.1,39.3) ; 60.02,41.6 v1(61.72,39.9) 64.1,37.52 64.1,37.1 v1(66.6,34.6) v1(66.6,31.9) 67.5,31 70.1,31 v1(73.1,28) 72.1,27 72.1,22.7 77.1,17.7 v1(77.1,16.4) 77.9,15.6 83.84,15.6 84.49,16.25 84.59,16.25 84.74,16.4 85.54,15.6 86.9,15.6 v1(87.7,16.4) 87.7,17.28 ; 87.7,17.28 83.7,21.28 83.7,23.06 83.65,23.11 83.65,23.75 82.82,24.58 82.82,24.63 82.75,24.71 82.75,25.49 83.31,26.05 83.41,26.05 83.7,26.34 v1(83.7,28) 83.7,28.88 83.4,29.18 83.4,31.3 81.9,32.8 v1(80.88,32.8) ; v1(91.48,32.8) 91.63,32.95 92.59,32.95
+12V: length 51.8
  TOP w0.6: U4.3 v1(8.1,50.7)
  TOP w0.9: TP1.1 C7.1 32.08,71.22 34.2,73.35 40.18,73.35 41.38,72.14 L2.1
  BOTTOM w0.3: v1(8.1,50.7) 8.1,62.9 16.42,71.22 TP1.1
-5V: length 157.5
  TOP w0.3: v1(80.8,31.2) C31.1 79.27,31.2 79.27,31.2 U8.5 ; U11.5 89.87,31.2 89.87,31.2 C39.1 v1(91.5,31.2) ; U7.2 75.6,24.2 C30.1 v1(76.3,22.7) ; U10.2 86.2,24.2 C40.1 v1(86.9,22.7)
  TOP w0.9: L1.1 39.5,79.47 38.88,78.86 C5.2 36.09,78.86 33.95,81 27.68,81 TP5.1
  LAYER3 w0.127: TP5.1 25.52,79.77 ; TP5.1 24.59,78.84 ; TP5.1 25.52,77.91 ; TP5.1 26.45,78.84
  LAYER3 w0.9: 76.3,31.3 76.4,31.2 v1(80.8,31.2) ; 76.3,31.3 76.3,36.8 ; 76.3,31.3 v1(76.3,22.7) ; 88.7,31.5 86.9,29.7 v1(86.9,22.7) ; 88.7,31.5 89,31.2 v1(91.5,31.2) ; 88.7,31.5 88.7,34.1 86,36.8 76.3,36.8 ; 76.3,36.8 76.3,50.6 76.06,50.6 75.5,51.16 75.5,51.94 75.93,52.37 50.89,77.41 26.95,77.41 TP5.1
GND: length 428.9
  TOP w0.127: J4.2 97.55,56.52 ; J4.2 95.49,56.52 ; J4.2 96.52,55.49 ; J4.2 96.52,57.54 ; 37.71,21.2 U12.11 40.07,21.2 ; TP6.1 13.24,78.44 ; TP6.1 12.31,79.37 ; TP6.1 12.31,77.51 ; TP6.1 11.38,78.44 ; 46.47,59.4 C17.2 ; C17.2 47.1,60.03 ; C17.2 47.73,59.4 ; 28.33,19.93 U12.7 30.69,19.93 ; C19.2 64.9,57.63 ; C19.2 64.9,56.37 ; C19.2 65.53,57 ; 37.71,19.93 U12.10 40.07,19.93 ; C33.2 73.73,25.8 ; C33.2 72.47,25.8 ; C33.2 73.1,26.43 ; C4.2 14.96,64.89 ; C4.2 14.33,64.27 ; C4.2 15.58,64.27 ; BT1.2 27.2,10.5 ; BT1.2 28.18,9.53 ; BT1.2 26.23,9.53 ; BT1.2 27.2,8.55 ; 88.37,27.5 C37.2 ; C37.2 89.63,27.5 ; C37.2 89,26.87 ; 56.3,28.97 C57.2 ; C57.2 55.67,29.6 ; C57.2 56.93,29.6 ; 37.71,22.46 U12.12 38.89,22.92 ; C40.2 85.5,24.13 ; C40.2 86.13,23.5 ; C40.2 85.5,22.87 ; R10.2 17.13,55.2 ; R10.2 15.87,55.2 ; R10.2 16.5,54.57 ; 53.27,37.9 C18.2 ; C18.2 53.9,37.27 ; C18.2 53.9,38.53 ; 17.13,52.4 R11.2 15.87,52.4 ; U1.3 17.82,69.57 ; U1.3 17.26,69.02 ; U1.3 18.37,69.02 ; 65.67,48.7 C11.1 ; C11.1 66.3,49.33 ; C11.1 66.93,48.7 ; C1.2 20.67,69.97 ; C1.2 21.3,69.34 ; C1.2 20.04,69.34 ; 40.8,47.17 C14.2 ; C14.2 40.8,48.43 ; C14.2 41.43,47.8 ; 11.58,50.7 U4.2 10.22,50.7 ; C5.1 33.05,78.86 ; C5.1 31.27,79.84 ; C5.1 31.27,77.88 ; C5.1 29.5,78.86 ; 25.82,52.78 25.82,53.26 ; 25.82,53.26 25.82,53.73 ; 25.82,53.26 24.99,53.26 ; C46.1 47.03,23.9 ; C46.1 46.4,24.53 ; C46.1 46.4,23.27 ; 20.04,64.27 C3.2 ; C3.2 21.3,64.27 ; C3.2 20.67,64.89 ; 34.93,52.5 C25.1 33.67,52.5 ; U12.8 30.69,18.66 ; U12.8 28.33,18.66 ; U12.8 29.51,18.2 ; 49.63,22.6 C56.2 49,21.97 ; 30.69,21.2 U12.6 28.33,21.2 ; U11.3 83.3,32.94 ; U11.3 83.3,31.99 ; U11.3 82.47,32.47 ; J2.4 68.14,72.39 ; J2.4 66.48,72.39 ; J2.4 67.31,73.22 ; J2.4 67.31,71.56 ; 84.87,16.4 C41.2 ; C41.2 85.5,15.77 ; C41.2 86.13,16.4 ; C41.2 85.5,17.03 ; U12.9 40.07,18.66 ; U12.9 37.71,18.66 ; U12.9 38.89,18.2 ; 29.51,22.92 U12.5 30.69,22.46 ; 25.82,56.59 U5.8 ; U5.8 25.82,57.54 ; U5.8 24.99,57.06 ; 79.17,20.5 R20.2 ; R20.2 80.43,20.5 ; R20.2 79.8,21.13 ; TP8.1 59.53,29.5 ; TP8.1 57.67,29.5 ; TP8.1 58.6,30.43 ; TP8.1 58.6,28.57 ; C58.2 60.73,20.6 ; C58.2 60.1,19.97 ; C58.2 60.1,21.23 ; 47.7,16.07 C51.2 47.07,16.7 ; 50.1,80.67 C6.2 ; C6.2 49.22,81.33 ; C6.2 50.98,81.33 ; J36.7 38.98,45.45 ; J36.7 38.43,43.87 ; J36.7 37.88,45.45 ; 54.3,60.17 C20.2 53.67,60.8 ; D4.1 48.3,8.5 ; D4.1 49.15,8 ; D4.1 47.45,8 ; 52.07,18.8 C55.2 53.33,18.8 ; 69.85,71.56 J2.6 ; J2.6 69.02,72.39 ; J2.6 69.85,73.22 ; J2.6 70.68,72.39 ; 15.87,53.8 R12.2 ; R12.2 16.5,54.43 ; R12.2 17.13,53.8 ; C13.2 48.8,38.53 ; C13.2 49.43,37.9 ; C13.2 48.8,37.27 ; U2.3 17.82,64.49 ; U2.3 18.37,63.94 ; U2.3 17.26,63.94 ; 26.6,21.57 C45.2 ; C45.2 27.23,22.2 ; C45.2 26.6,22.83 ; 73.6,15.77 R16.2 74.23,16.4 ; 95.49,45.09 J9.2 ; J9.2 96.52,44.06 ; J9.2 97.55,45.09 ; J9.2 96.52,46.11 ; 21.8,45.97 C22.1 ; C22.1 21.17,46.6 ; C22.1 22.43,46.6 ; C43.2 83.7,26.43 ; C43.2 84.33,25.8 ; C43.2 83.07,25.8 ; 40.97,43.87 J36.3 ; J36.3 40.42,45.45 ; J36.3 41.52,45.45 ; C30.2 74.9,24.13 ; C30.2 75.53,23.5 ; C30.2 74.9,22.87 ; 89.97,29.8 C39.2 ; C39.2 90.6,29.17 ; C39.2 90.6,30.43 ; 14.33,69.34 C2.2 ; C2.2 15.58,69.34 ; C2.2 14.96,69.97 ; 49.67,16.7 C52.1 ; C52.1 50.3,17.33 ; C52.1 50.3,16.07 ; 74.27,16.4 C32.2 ; C32.2 75.53,16.4 ; C32.2 74.9,17.03 ; C32.2 74.9,15.77 ; 84.83,16.4 R22.2 84.2,15.77 ; 79.37,29.8 C31.2 ; C31.2 80,29.17 ; C31.2 80,30.43 ; 77.77,27.5 C28.2 ; C28.2 78.4,26.87 ; C28.2 79.03,27.5 ; 80,33.57 C34.2 ; C34.2 79.37,34.2 ; C34.2 80,34.83 ; C47.1 47.03,25.3 ; C47.1 46.4,25.93 ; C47.1 46.4,24.67 ; X1.2 61.18,12.6 ; X1.2 60.1,11.82 ; X1.2 59.02,12.6 ; X1.4 57.18,15 ; X1.4 56.1,15.78 ; X1.4 55.02,15 ; R3.1 93,31.83 ; R3.1 92.37,31.2 ; R3.1 93.63,31.2 ; R26.2 90.4,21.13 ; R26.2 91.03,20.5 ; R26.2 89.77,20.5 ; 65.67,50.3 C15.2 ; C15.2 66.93,50.3 ; C15.2 66.3,49.67 ; 36.27,70.24 C7.2 36.27,72.2 ; 36.27,62.62 C9.2 36.27,64.58 ; 47.07,18 R29.1 ; R29.1 48.33,18 ; R29.1 47.7,18.63 ; 14.86,32.38 C44.2 ; C44.2 15.84,33.36 ; C44.2 16.81,32.38 ; C44.2 15.84,31.41 ; 50.1,73.37 C8.2 ; C8.2 49.22,74.03 ; C8.2 50.98,74.03 ; J36.5 40.25,45.45 ; J36.5 39.7,43.87 ; J36.5 39.15,45.45 ; 67.31,81.92 67.31,82.74 ; 67.31,81.92 66.48,81.92 ; 67.31,81.92 67.31,81.09 ; 67.31,81.92 68.14,81.92 ; 63.37,39.9 C16.2 64,40.53 ; 55.8,37.27 C12.1 ; C12.1 55.17,37.9 ; C12.1 55.8,38.53 ; 15.37,59.1 C24.1 ; C24.1 16.63,59.1 ; C24.1 16,59.73 ; 59.7,16.88 C54.2 59.7,15.92 ; 47.07,9.8 C50.2 ; C50.2 47.7,10.43 ; C50.2 47.7,9.17 ; 89.97,34.2 C42.2 ; C42.2 90.6,33.57 ; C42.2 90.6,34.83 ; 71.87,32.47 72.7,32.47 ; 72.7,32.47 72.7,31.99 ; 72.7,32.47 72.7,32.94 ; 36.61,45.45 J36.9 ; J36.9 37.71,45.45 ; J36.9 37.16,43.87 ; 56.6,15.92 C53.2 56.6,16.88 ; 49.22,69.62 C10.2 ; C10.2 50.98,69.62 ; C10.2 50.1,68.97 ; 11.33,52.8 10.68,52.8 10.68,51.92 ; 69.85,81.09 69.85,81.92 ; 69.85,81.92 70.68,81.92 ; 69.85,81.92 69.02,81.92 ; 69.85,81.92 69.85,82.74
  TOP w0.2: C52.1 v1(51.2,16.7) ; U4.2 10.9,48.9
  TOP w0.25: 55.5,21.9 55.55,21.85 U13.7 55.55,19.85 55.9,19.5 v1(56.2,19.5) ; 53.5,21.9 53.55,21.85 U13.3 53.55,19.65 C55.2 ; C57.2 55.42,28.73 55.29,28.73 55.05,28.48 U13.19 55.05,26.2 ; 52.15,22.95 U13.31 49.35,22.95 C56.2
  TOP w0.3: C45.2 v1(25.7,22.2) ; 37,26.3 37.02,26.27 U12.15 v1(40.38,26.27) ; U9.2 v1(86.2,21.4) ; C47.1 v1(45.6,25.3) ; C55.2 v1(52.7,18) ; U12.9 U12.10 U12.11 U12.12 v1(40.56,22.46) ; U3.10 v1(48.5,50.8) ; D4.1 v1(48.3,7.4) ; C32.2 75.55,17.05 v1(75.55,17.45) ; R16.2 v1(73.6,17.2) ; v1(86.15,17.45) 86.15,17.05 C41.2 ; C22.1 v1(21.8,47.5) ; C33.2 v1(73.1,25.1) ; C50.2 v1(48.5,9.8) ; v1(16.5,51.6) R11.2 R12.2 ; C54.2 v1(60.3,16.4) ; v1(39.7,47.8) C14.2 40.97,47.63 J36.3 ; v1(39.7,47.8) J36.5 ; v1(39.7,47.8) v1(38.43,47.8) ; C13.2 v1(48,37.9) ; C58.2 v1(59.3,20.6) ; C19.2 v1(64,57) ; U3.87 v1(55.3,55.7) ; U12.8 U12.7 U12.6 U12.5 v1(27.77,22.46) ; C37.2 v1(89,28.2) ; 54.8,42.6 U3.38 54.8,40.2 54.84,40.16 v1(54.84,40.06) ; C30.2 v1(74,23.5) ; 63.9,49.8 U3.64 v1(61.15,49.8) ; C56.2 v1(48.2,22.6) ; R29.1 C51.2 v1(48.5,16.7) ; C12.1 v1(56.6,37.9) ; X1.4 v1(56.1,14.1) ; C25.1 v1(34.3,51.6) ; R10.2 v1(16.5,56) ; v1(64,50.95) 64,50.9 63.8,50.9 63.7,50.8 U3.66 61.3,50.8 ; C53.2 v1(55.9,16.4) ; v1(38.43,47.8) 37.85,47.8 37.78,47.73 37.76,47.73 37.16,47.13 J36.9 ; v1(38.43,47.8) J36.7 ; U5.8 v1(26.86,57.06) ; C24.1 v1(16,58.4) ; C43.2 v1(83.7,25.1) ; 10.9,46.4 v1(10.9,45.4) ; 25.82,53.26 v1(26.86,53.26) ; C34.2 v1(80.88,34.2) ; C20.2 v1(54.3,61.7) ; C59.2 v1(55.5,61.7) ; C31.2 v1(80.88,29.8) ; U3.14 v1(48.5,48.8) ; R26.2 v1(90.4,19.7) ; C46.1 v1(45.6,23.9) ; C16.2 v1(64.9,39.9) ; v1(47.1,58.52) C17.2 ; C15.2 v1(66.3,51.3) ; U11.3 v1(84.44,32.47) ; C11.1 v1(66.3,47.8) ; R20.2 v1(79.8,19.7) ; 48.18,49.3 U3.13 45.5,49.3 v1(45.3,49.5) 45.6,49.8 U3.12 48.5,49.8 ; R22.2 v1(84.2,17.2) ; C57.2 v1(56.3,30.5) ; 72.7,32.47 v1(73.83,32.47) ; C28.2 v1(78.4,28.2) ; v1(54.9,37.9) C18.2 ; C39.2 v1(91.5,29.8) ; C42.2 v1(91.48,34.2) ; C40.2 v1(84.6,23.5) ; X1.2 v1(60.1,13.5) ; U6.2 v1(75.6,21.4)
  TOP w0.6: C2.2 v1(14.96,68.45) ; 10.68,52.8 10.9,52.58 U4.2 ; 10.68,52.8 v1(10.68,53.9) ; 10.68,52.8 v1(9.7,52.8) ; U1.3 v1(17.82,68.31) ; v1(33.3,78.85) 31.29,78.85 C5.1 31.21,78.8 v1(29.2,78.8) ; v1(38.3,63.6) C9.2 v1(34.2,63.6) ; 50.1,74.2 v1(50.8,74.9) ; 50.1,74.2 v1(49.4,74.9) ; 50.1,74.2 C8.2 ; 50.1,81.5 v1(50.8,82.2) ; 50.1,81.5 C6.2 ; 50.1,81.5 v1(49.4,82.2) ; C1.2 v1(20.67,68.43) ; C4.2 v1(14.96,63.35) ; v1(49.4,70.5) 50.1,69.8 ; 50.1,69.8 v1(50.8,70.5) ; 50.1,69.8 C10.2 ; v1(38.28,71.22) C7.2 v1(34.22,71.22) ; C3.2 v1(20.67,63.43) ; U2.3 v1(17.82,63.19) ; R3.1 v1(92.2,32)
  LAYER2 w0.127: J2.4 67.31,73.22 ; J2.4 68.14,72.39 ; J2.4 67.31,71.56 ; J2.4 66.48,72.39 ; 15.84,31.41 C44.2 ; C44.2 14.86,32.38 ; C44.2 16.81,32.38 ; C44.2 15.84,33.36 ; 12.31,77.51 TP6.1 ; TP6.1 13.24,78.44 ; TP6.1 11.38,78.44 ; TP6.1 12.31,79.37 ; 69.85,81.92 70.68,81.92 ; 69.85,81.92 69.85,82.74 ; 69.85,81.92 69.85,81.09 ; 69.85,81.92 69.02,81.92 ; 58.6,28.57 TP8.1 ; TP8.1 58.6,30.43 ; TP8.1 57.67,29.5 ; TP8.1 59.53,29.5 ; 95.49,45.09 J9.2 ; J9.2 97.55,45.09 ; J9.2 96.52,46.11 ; J9.2 96.52,44.06 ; J2.6 69.85,73.22 ; J2.6 69.02,72.39 ; J2.6 69.85,71.56 ; J2.6 70.68,72.39 ; BT1.2 28.18,9.53 ; BT1.2 27.2,10.5 ; BT1.2 26.23,9.53 ; BT1.2 27.2,8.55 ; 67.31,81.09 67.31,81.92 ; 67.31,81.92 66.48,81.92 ; 67.31,81.92 67.31,82.74 ; 67.31,81.92 68.14,81.92 ; J4.2 96.52,57.54 ; J4.2 96.52,55.49 ; J4.2 95.49,56.52 ; J4.2 97.55,56.52
  LAYER3 w0.127: J2.4 68.14,72.39 ; J2.4 66.48,72.39 ; J2.4 67.31,71.56 ; J2.4 67.31,73.22 ; 12.31,77.51 TP6.1 ; TP6.1 13.24,78.44 ; TP6.1 11.38,78.44 ; TP6.1 12.31,79.37 ; J2.6 69.85,73.22 ; J2.6 69.02,72.39 ; J2.6 69.85,71.56 ; J2.6 70.68,72.39 ; 95.49,56.52 J4.2 ; J4.2 96.52,57.54 ; J4.2 97.55,56.52 ; J4.2 96.52,55.49 ; 67.31,81.09 67.31,81.92 ; 67.31,81.92 67.31,82.74 ; 67.31,81.92 68.14,81.92 ; 67.31,81.92 66.48,81.92 ; J9.2 97.55,45.09 ; J9.2 96.52,46.11 ; J9.2 95.49,45.09 ; J9.2 96.52,44.06 ; 69.85,81.92 70.68,81.92 ; 69.85,81.92 69.85,81.09 ; 69.85,81.92 69.85,82.74 ; 69.85,81.92 69.02,81.92
  BOTTOM w0.127: 95.49,45.09 J9.2 ; J9.2 96.52,46.11 ; J9.2 97.55,45.09 ; J9.2 96.52,44.06 ; 67.31,81.09 67.31,81.92 ; 67.31,81.92 68.14,81.92 ; 67.31,81.92 67.31,82.74 ; 67.31,81.92 66.48,81.92 ; C44.2 15.84,33.36 ; C44.2 16.81,32.38 ; C44.2 14.86,32.38 ; C44.2 15.84,31.41 ; J2.4 68.14,72.39 ; J2.4 67.31,73.22 ; J2.4 67.31,71.56 ; 27.2,8.55 BT1.2 ; BT1.2 26.23,9.53 ; BT1.2 27.2,10.5 ; BT1.2 28.18,9.53 ; J4.2 97.55,56.52 ; J4.2 95.49,56.52 ; J4.2 96.52,57.54 ; J4.2 96.52,55.49 ; 69.85,81.09 69.85,81.92 ; 69.85,81.92 69.02,81.92 ; 69.85,81.92 69.85,82.74 ; 69.85,81.92 70.68,81.92 ; TP6.1 12.31,79.37 ; TP6.1 12.31,77.51 ; TP6.1 11.38,78.44 ; TP6.1 13.24,78.44 ; 57.67,29.5 TP8.1 ; TP8.1 59.53,29.5 ; TP8.1 58.6,28.57 ; TP8.1 58.6,30.43 ; 69.85,71.56 J2.6 ; J2.6 69.02,72.39 ; J2.6 70.68,72.39 ; J2.6 69.85,73.22
  vias: v1(41.55,56.4) v1(42.1,53.9) v1(46.95,5.35) v1(50.25,26.6) v1(50.7,20.85) v1(52.1,28.85) v1(53.4,13.8) v1(54,15.5) v1(54.6,9.7) v1(55.1,17.8) v1(55.7,10.8) v1(57.3,5.35) v1(57.5,18.3) v1(57.85,11.85) v1(58,8.9) v1(58.35,15.5) v1(59,18.7) v1(60.7,10.7) v1(61.6,9.8) v1(62.3,15.6) v1(62.3,12.6) v1(64.55,6.85) v1(67.8,42) v1(69.1,43.15) v1(69.3,54.35) v1(69.6,51.35) v1(69.65,56.3) v1(69.7,52.9) v1(71.6,5.35) v1(76.45,51.55) v1(78.9,6.95) v1(79,77.45) v1(86.35,11.4) v1(88.2,5.25) v1(89.75,83.7) v1(90.5,78.5) v1(91,50.35) v1(91.3,68.6) v1(91.5,13.95) v1(92.5,9.4) v1(92.95,78.35) v1(93.35,38.05) v1(94.1,8.45) v1(96.95,37.65)
VCCD: length 25.3
  TOP w0.3: U3.39 55.3,40.52 55.4,40.42 55.41,40.42 55.8,40.03 C12.2 v1(56.6,39.3) ; U3.86 55.8,58.2 55.62,58.38 v1(55.62,58.42) 55.62,59.28 C59.1
  BOTTOM w0.3: v1(56.6,39.3) 56,39.9 56,57.47 55.62,57.84 v1(55.62,58.42)
CH_AVDD: length 3.8
  TOP w0.25: U13.32 50.9,22.07 50.03,21.2 C56.1
  TOP w0.3: C56.1 L5.2
F4_M: length 40.7
  TOP w0.2: U3.84 56.8,60.5 v1(57.2,60.9)
  BOTTOM w0.2: v1(57.2,60.9) 61,64.7 73.4,64.7 77.47,68.77 J2.12 77.47,81.92
F8_G: length 37.6
  TOP w0.2: U3.85 56.3,61 60.1,64.8 65.9,64.8 66.85,65.75 73.05,65.75 76.2,68.9 J2.11
  BOTTOM w0.2: J2.11 J1.11
FF_G: length 43.5
  TOP w0.2: J2.9 73.66,68.86 71.8,67 66.45,67 65.35,65.9 51.1,65.9 50.3,65.1 U3.97
  BOTTOM w0.2: J1.9 J2.9
FF_M: length 46.7
  TOP w0.2: J2.10 74.93,68.88 72.35,66.3 66.6,66.3 65.7,65.4 51.3,65.4 50.8,64.9 U3.96
  BOTTOM w0.2: J2.10 74.93,81.92
FH_G: length 41.5
  TOP w0.2: U3.99 49.3,65.4 50.8,66.9 64.85,66.9 66.25,68.3 69.57,68.3 J2.7
  BOTTOM w0.2: J2.7 J1.7
FH_M: length 45.3
  TOP w0.2: U3.98 49.8,65.2 51,66.4 65.15,66.4 66.45,67.7 71.2,67.7 72.39,68.89 J2.8
  BOTTOM w0.2: 72.39,81.92 J2.8
GEN_VIDEO: length 165.7
  TOP w0.2: v1(45.9,7.25) D4.2 45.9,8.55 46.3,8.95 C50.1 47,10.5 L4.1 ; J1.5 68.58,82.88 69.2,83.5 88.6,83.5 92.1,80 92.1,41.5 v1(94.6,39)
  BOTTOM w0.2: v1(45.9,7.25) 47.05,6.1 90.3,6.1 95.6,11.4 95.6,38 v1(94.6,39) ; J1.5 J2.5
GPS_GND: length 6
  TOP w0.6: J29.4 95.36,31.11 95.28,31.2 R3.2
GPS_LOCK_STAT: length 5.3
  TOP w0.3: 100.33,13.34 99.4,13.34 99.27,13.2 96.73,13.2 96.33,12.8 J43.1
GPS_PPS: length 69.6
  TOP w0.2: v1(77.8,12.8) J44.1 ; v1(58.7,44.7) 57.3,43.3 53.5,43.3 52.8,42.6 U3.34
  TOP w0.3: J29.19 96.67,12.06 96.2,11.6 94.5,11.6 J44.1
  BOTTOM w0.2: v1(77.8,12.8) 77.8,27.65 65.5,39.95 65.5,40.15 60.95,44.7 v1(58.7,44.7)
GPS_REQ: length 5.3
  TOP w0.3: J42.1 94.3,14.1 96.19,14.1 96.7,14.61 J29.17
GPS_SCL: length 5.3
  TOP w0.3: J39.1 96.33,17.72 96.91,18.3 99.29,18.3 99.4,18.41 J29.14
GPS_SDA: length 5.3
  TOP w0.3: J29.15 96.72,17.14 96.19,16.62 94.3,16.62 J40.1
GPS_TX: length 73.6
  TOP w0.2: v1(76.2,13.6) 76.2,12.9 78.7,10.4 J45.1 ; v1(57,44) 53.22,44 51.8,42.58 U3.32
  TOP w0.3: J29.20 99.4,10.79 99.21,10.6 96.53,10.6 96.33,10.4 J45.1
  BOTTOM w0.2: v1(76.2,13.6) 76.2,14.13 76.05,14.28 76.05,16.7 76.9,17.55 76.9,27 59.9,44 v1(57,44)
N16724867_LTC_DRV1: length 12.8
  TOP w0.2: U7.4 76.55,28.57 76.5,28.62 C27.2 ; U7.4 77.13,27.7 77.5,28.07 77.5,28.5 77.8,28.8 79.2,28.8 79.8,28.2 C26.2 ; U7.4 76.55,27.55 75.4,26.4 75.2,26.4 74.65,25.85 U7.1
N16724867_LTC_DRV3: length 12.8
  TOP w0.2: U10.4 87.15,28.57 87.1,28.62 C36.2 ; U10.4 87.15,27.55 86,26.4 85.8,26.4 85.25,25.85 U10.1 ; U10.4 87.73,27.7 88.1,28.07 88.1,28.5 88.4,28.8 89.8,28.8 90.4,28.2 C35.2
N16724877_LTC_DRV1: length 3.7
  TOP w0.2: C27.1 73.8,29.3 72.7,30.4 72.7,30.67 72.7,31.2
N16724877_LTC_DRV3: length 3.7
  TOP w0.2: U11.4 83.3,30.67 83.3,30.4 84.4,29.3 C36.1
N16725257_LTC_DRV1: length 3.4
  TOP w0.2: U7.3 77.32,25.1 77.72,24.7 R19.2 C28.1
N16725257_LTC_DRV3: length 3.4
  TOP w0.2: U10.3 87.92,25.1 88.32,24.7 R25.2 C37.1
N16725561_LTC_DRV1: length 4.2
  TOP w0.2: C26.1 R19.1 R18.2 R20.1
N16725561_LTC_DRV3: length 4.2
  TOP w0.2: C35.1 R25.1 R24.2 R26.1
N16726085_LTC_DRV1: length 3.3
  TOP w0.2: C29.2 R18.1 U6.1
N16726085_LTC_DRV3: length 3.2
  TOP w0.2: C38.2 R24.1 U9.1
N16726903_LTC_DRV1: length 6
  TOP w0.2: U6.4 74.65,18.05 75.4,18.8 77.3,18.8 C29.1 R17.2
N16726903_LTC_DRV3: length 6
  TOP w0.2: U9.4 85.25,18.05 86,18.8 87.9,18.8 C38.1 R23.2
N16727359_LTC_DRV1: length 7.9
  TOP w0.2: U6.3 74.65,20.35 72.8,18.5 72.8,15.8 R16.1 R15.2
N16727359_LTC_DRV3: length 7.9
  TOP w0.2: R21.2 R22.1 83.4,15.8 83.4,18.5 85.25,20.35 U9.3
NMRES: length 42.5
  TOP w0.2: J2.16 82.55,68.9 76.64,62.99 68.89,62.99 66.1,60.2 60.5,60.2 58.8,58.5 U3.80
  BOTTOM w0.2: J2.16 82.55,81.92
PLL_AVDD: length 3.3
  TOP w0.25: C55.1 54.1,19.7 54.05,19.75 U13.4
  TOP w0.3: C55.1 54.1,17.7 L6.2
SCL1: length 33.4
  TOP w0.2: J2.14 80.01,68.96 75.28,64.23 68.43,64.23 66.3,62.1 R1.1
  BOTTOM w0.2: J2.14 80.01,81.92
SDA1: length 29.8
  TOP w0.2: R2.1 66.2,61.1 68.69,63.59 75.99,63.59 81.28,68.88 J2.15
  BOTTOM w0.2: J1.15 J2.15
TCK: length 42
  TOP w0.2: J2.19 86.36,68.97 78.47,61.09 69.68,61.09 67.32,58.73 61.03,58.73 60.3,58 U3.77
  BOTTOM w0.2: J1.19 J2.19
TCODECLK: length 26.4
  TOP w0.2: J1.13 77.9,78.53 R32.2 77.9,74.2 78.7,73.4 78.7,71.7 77.5,70.5 77.5,68.85 73.65,65 67.5,65 66.1,63.6 R33.1
TDI: length 40.7
  TOP w0.2: U3.79 59.3,58.4 60.6,59.7 66.5,59.7 69.19,62.39 77.29,62.39 83.82,68.92 J2.17
  BOTTOM w0.2: J1.17 J2.17
TDO: length 45.1
  TOP w0.2: J2.20 87.63,68.93 79.09,60.39 69.79,60.39 67.7,58.3 61.4,58.3 60.8,57.7 U3.76
  BOTTOM w0.2: 87.63,81.92 J2.20
TMS0: length 43.8
  TOP w0.2: U3.78 59.8,58.13 60.87,59.2 66.8,59.2 69.39,61.79 77.94,61.79 85.09,68.94 J2.18
  BOTTOM w0.2: J2.18 85.09,81.92
XK1+5V: length 32.3
  TOP w0.9: L3.2 46.34,66.18 47.93,67.78 C10.1 51.38,67.78 52,68.4 64.59,68.4 J2.3
  BOTTOM w0.3: J2.3 66.04,70.78 66.3,71.04 66.3,78.19 66.04,78.45 J1.3
XK1+12V: length 29.6
  TOP w0.9: J2.2 62.86,74.3 54.3,74.3 52.2,72.2 51.25,72.2 51.23,72.17 C8.1 47.75,72.17 47.71,72.14 L2.2
  BOTTOM w0.3: J2.2 64.77,81.92
XK1-5V: length 26.9
  TOP w0.9: L1.2 C6.1 51.23,79.47 51.33,79.38 J1.1
  BOTTOM w0.3: J2.1 63.5,70.93 63.25,71.17 63.25,72.13 63.25,72.13 63.25,78.2 63.5,78.45 J1.1
N06092: length 48.3
  TOP w0.3: J3.3 79.4,48.92 79.4,40 74.41,35.01 72.7,35.01 72.7,33.73
  BOTTOM w0.3: J3.4 J3.3 J3.2 J3.5 94.8,58.42 95.39,59.02 J4.3
N06162: length 39.1
  TOP w0.3: J3.1 86.36,52.56 84.8,51 83,51 80.4,48.4 80.4,39.8 76.89,36.29 76.89,35.29 77.17,35.01 U8.8 U8.7
  BOTTOM w0.3: J3.1 92.82,55.88 94.7,54 95.38,54 95.39,54.02 J4.1
N06285: length 33.4
  TOP w0.3: J8.4 85.4,40.33 85.4,36.1 84.31,35.01 U11.1 U11.2
  BOTTOM w0.3: J8.5 J8.4 J8.3 J8.2 94.8,46.99 95.39,47.59 J9.3
N06301: length 23.4
  TOP w0.3: J8.1 86.36,36.04 87.39,35.01 U11.8 U11.7
  BOTTOM w0.3: J8.1 92.65,44.45 94.52,42.59 J9.1
N07596: length 35.7
  TOP w0.2: U3.1 46.4,55.3 41.1,60.6 26.63,60.6 23.8,57.77 23.8,53.1 21.41,50.72 20.42,50.72
N07608: length 33.9
  TOP w0.2: U3.2 46.18,54.8 45.95,55.03 45.95,55.1 40.85,60.2 26.8,60.2 24.3,57.7 24.3,51.88 25.47,50.72 25.82,50.72
N07620: length 29.7
  TOP w0.2: U3.3 46.02,54.3 40.67,59.65 31.45,59.65 30.15,58.35 30.15,53.15 TP10.1
  TOP w0.3: U5.4 27.96,51.98 27.97,52 TP10.1
N07632: length 26.9
  TOP w0.2: U3.4 45.87,53.8 40.57,59.1 33.6,59.1 32.9,58.4 R14.2 C25.2 32.9,49.4 32.05,48.55 D3.1
N07789: length 31.7
  TOP w0.2: v1(54.2,24.45) U13.28 ; v1(50,47.8) U3.16
  BOTTOM w0.2: v1(54.2,24.45) 54.6,24.85 54.6,29.6 53.7,30.5 53.7,39.9 53.1,40.5 53.1,43 50,46.1 v1(50,47.8)
N07795: length 25.8
  TOP w0.2: U13.25 50.9,26.85 49.38,28.38 v1(48.48,28.38) ; v1(45.4,47.3) U3.17
  BOTTOM w0.2: v1(45.4,47.3) 45.4,31.45 v1(48.48,28.38)
N07807: length 26.6
  TOP w0.2: v1(44.7,46.4) 45.5,46.4 45.9,46.8 U3.18 ; U13.26 50,25.45 49.8,25.65 49.8,26.1 v1(47.55,28.35)
  BOTTOM w0.2: v1(47.55,28.35) 44.7,31.2 v1(44.7,46.4)
N07819: length 27.5
  TOP w0.2: U13.27 52.17,24.95 52.47,25.25 v1(53,25.25) ; v1(48.7,46.3) U3.19
  BOTTOM w0.2: v1(48.7,46.3) 49.23,46.3 52.42,43.1 52.42,30.38 53.6,29.2 53.6,25.85 v1(53,25.25)
N07831: length 20.8
  TOP w0.2: v1(51.8,28) 52.2,27.6 U13.24 ; v1(48.8,44.9) 48.27,44.9 48.17,44.8 U3.22
  BOTTOM w0.2: v1(51.8,28) 51.43,28.37 51.43,41.75 48.8,44.37 v1(48.8,44.9)
N07843: length 20.9
  TOP w0.2: U3.23 v1(49.9,44.3) ; U13.23 53.05,28.85 v1(53,28.9)
  BOTTOM w0.2: v1(53,28.9) 51.9,30 51.9,42.3 v1(49.9,44.3)
N07855: length 43.2
  TOP w0.2: U3.24 45.6,43.8 44.5,42.7 44.5,33.2 45.6,32.1 51.5,32.1 53.6,30 53.6,29.5 ; 53.6,29.5 43.7,29.5 41.74,27.55 U12.16 38.89,29.21 38.9,29.22 R5.2 ; 53.6,29.5 53.6,28.68 53.55,28.63 U13.22
N07859: length 54.3
  TOP w0.2: R4.2 29.5,28.06 29.51,28.05 U12.1 31.95,27.55 32.6,26.9 41.9,26.9 44,29 49.4,29 51.9,26.5 53.88,26.5 54.05,26.67 U13.21 54.05,30.35 51.7,32.7 45.8,32.7 45.2,33.3 45.2,42.6 45.9,43.3 U3.25
N07863: length 33.9
  TOP w0.2: U3.27 49.3,42.8 49.55,43.05 50.55,43.05 52.1,44.6 v1(52.1,45.6) ; U13.8 56.9,20.8 v1(57.4,21.3)
  BOTTOM w0.2: v1(57.4,21.3) 57.4,28.9 57.2,29.1 57.2,30.9 54.24,33.86 54.24,40.31 54.3,40.37 54.3,43.4 v1(52.1,45.6)
N08147: length 7.6
  TOP w0.2: J36.2 42.24,42.98 42.41,43.15 42.75,43.15 45.4,45.8 U3.20
N08159: length 11.6
  TOP w0.2: U3.21 45.55,45.3 43.1,42.85 43.1,39.9 42.7,39.5 41.8,39.5 40.97,40.33 J36.4
N08171: length 18.4
  TOP w0.2: U3.15 46.02,48.3 45.52,48.8 37.7,48.8 36.2,47.3 36.2,41.71 36.56,41.35 J36.10
N09025: length 34.9
  TOP w0.2: U3.28 49.8,40.5 v1(49.5,40.2) ; v1(43.8,27.5) 41.9,25.6 32.6,25.6 31.93,26.27 U12.2
  BOTTOM w0.2: v1(49.5,40.2) 49.5,38.75 49.7,38.55 49.7,28.5 48.7,27.5 v1(43.8,27.5)
N09032: length 36
  TOP w0.2: v1(50.17,38.93) 50.17,39.61 50.1,39.68 50.1,40.23 50.2,40.33 50.2,40.39 50.3,40.49 U3.29 ; v1(43.8,25.4) 42.8,24.4 32.5,24.4 31.89,25 29.51,25
  BOTTOM w0.2: v1(43.8,25.4) 45.4,27 48.9,27 50.3,28.4 50.3,38.27 50.17,38.4 v1(50.17,38.93)
N09039: length 26.8
  TOP w0.2: v1(50.7,39.93) 50.7,40.05 50.8,40.15 U3.30 ; v1(45.8,26.4) 43.6,26.4 42.2,25 38.89,25
  BOTTOM w0.2: v1(45.8,26.4) 49.1,26.4 50.75,28.05 50.75,38.81 50.9,38.95 50.9,39.2 50.7,39.4 v1(50.7,39.93)
N12453: length 1.6
  TOP w0.2: R6.1 D1.A
N12457: length 1.6
  TOP w0.2: R7.1 D2.A
N12461: length 9.7
  TOP w0.2: D1.C TP7.1 57.8,35.4 U3.44
N12468: length 12.6
  TOP w0.2: U3.43 57.3,33.2 TP9.1 D2.C
N12607: length 50.1
  TOP w0.2: v1(59.8,50.7) 59.8,51.6 61,52.8 U3.70 ; v1(78.4,14) R17.1
  BOTTOM w0.2: v1(59.8,50.7) 59.8,48.3 79.1,29 79.1,14.7 v1(78.4,14)
N12619: length 52.7
  TOP w0.2: U3.69 61.4,52.3 v1(60.55,51.45) ; v1(89,14.1) R23.1
  BOTTOM w0.2: v1(60.55,51.45) 68.4,43.6 68.4,41.4 81.5,28.3 81.5,21 88.03,14.47 88.63,14.47 v1(89,14.1)
N20020: length 6.4
  TOP w0.2: U3.82 57.8,58.9 R1.2
N20024: length 8.2
  TOP w0.2: R2.2 60.64,61.1 58.3,58.76 U3.81
N16722215: length 15.8
  TOP w0.3: C21.1 13.9,52.8 14.43,52.27 14.43,48.48 14.72,48.17 U5.16 20.42,47.35 20.4,47.33 C22.2
  TOP w0.6: C21.1 12.4,52.67 U4.1
N16722960: length 3.9
  TOP w0.25: U13.29 50.02,23.95 49.77,24.19 49.77,24.52 C48.2
  TOP w0.3: C48.2 C47.2
N16722974: length 3.3
  TOP w0.25: C48.1 49.43,23.9 49.88,23.45 U13.30
  TOP w0.3: C48.1 C46.2
N16723190: length 2.9
  TOP w0.2: U13.11 58.85,23.45 R31.1
N16723966: length 13
  TOP w0.2: 59.8,15 59.8,15.1 59.1,15.8 59.1,16 C54.1 58,17.1 57.55,17.1 55.25,19.4 55.25,19.54 55.05,19.74 U13.6 ; 59.8,15 58.6,13.8 R30.2 ; 59.8,15 X1.3
N16724164: length 14.8
  TOP w0.3: R27.2 10.84,20.27 C44.1
N16724170: length 41.1
  TOP w0.3: U12.13 35.84,23.73 34.2,22.1 34.2,18.1 32.6,16.5 24.2,16.5 22.3,18.4 R27.1 14.1,12.67 BT1.1
N16724335: length 12.4
  TOP w0.2: 56.4,12.6 X1.1 ; 56.4,12.6 57.16,11.84 57.16,11.54 57.2,11.5 R30.1 ; 56.4,12.6 57.6,13.8 C53.1 57.2,16.8 57.2,16.82 57.14,16.88 57.14,16.95 54.85,19.24 54.85,19.37 54.55,19.67 U13.5
N16724829: length 4.1
  TOP w0.3: U5.1 27.15,48.17 27.17,48.2 R13.1 TP11.1
N16724836: length 2.1
  TOP w0.3: R13.2 28.63,49.6 28.73,49.5 D3.3
N16724852: length 1.6
  TOP w0.3: R9.2 C24.2
N16724946: length 9.3
  TOP w0.3: U5.13 21.98,51.98 23.3,53.3 23.3,58.1 23.5,58.3 R8.1
N16724960: length 3.7
  TOP w0.3: R8.2 R9.1 20.4,57.66 20.42,57.64 U5.9
N16724992: length 2.3
  TOP w0.3: U5.6 26.77,54.52 27.02,54.27 C23.2
N16725000: length 2.3
  TOP w0.3: 25.82,55.8 27.67,55.8 C23.1
N16725051: length 4.4
  TOP w0.2: U13.2 53.05,19.87 52.88,19.7 52.05,19.7 50.9,18.55 50.75,18.55 C52.2
N16725076: length 3
  TOP w0.2: U13.1 52.2,20.8 52.05,20.65 52.05,20.4 51.05,19.4 C49.2
N16725089: length 4.1
  TOP w0.3: 20.42,53.26 19.17,53.26 18.63,53.8 R12.1 R11.1
N16725105: length 2.8
  TOP w0.3: R10.1 19.39,55.2 20.07,54.52 U5.11
N16725283: length 2.6
  TOP w0.2: C49.1 R29.2 R28.2
N16725403: length 3.5
  TOP w0.2: R28.1 C51.1 46.3,15.45 L4.2
N16727182: length 2.6
  TOP w0.3: U3.63 63.5,49.3 64.1,48.7 C11.2
N16727279: length 5.3
  TOP w0.3: J41.1 96.33,15.2 96.93,15.8 99.33,15.8 99.4,15.88 J29.16
N16730628: length 5.3
  TOP w0.3: J38.1 94.3,19.14 96.19,19.14 96.74,19.68 J29.13
N16730630: length 5.3
  TOP w0.3: J29.8 97.08,26.04 96.33,25.28 J32.1
N16730632: length 5.3
  TOP w0.3: J37.1 96.33,20.24 96.89,20.8 99.25,20.8 99.4,20.95 J29.12
N16730634: length 5.3
  TOP w0.3: J29.11 96.76,22.23 96.19,21.66 94.3,21.66 J35.1
N16730636: length 5.3
  TOP w0.3: J29.7 96.86,27.3 96.26,26.7 94.41,26.7 94.3,26.7 J28.1
N16730638: length 5.4
  TOP w0.3: J29.6 99.4,28.57 99.23,28.4 96.93,28.4 96.33,27.8 J27.1
N16730640: length 5.3
  TOP w0.3: J29.10 99.4,23.5 99.31,23.4 96.97,23.4 96.33,22.76 J34.1
N16730642: length 4.7
  TOP w0.3: J25.1 94.23,29.7 94.37,29.84 J29.5
N16730644: length 5.3
  TOP w0.3: J29.9 96.86,24.77 96.28,24.18 94.3,24.18 J33.1
N16730664: length 4.8
  TOP w0.3: J29.1 94.8,34.92 94.23,35.5 J21.1
N16730666: length 5.1
  TOP w0.3: J22.1 96.33,33.4 96.58,33.66 J29.2
N16730668: length 5.1
  TOP w0.3: J29.3 96.28,32.38 96.19,32.3 94.41,32.3 94.3,32.3 J23.1
N16731426: length 9.8
  TOP w0.2: J31.1 68.45,40.1 65.25,43.3 U3.51
N16731428: length 8.7
  TOP w0.2: U3.53 69.42,44.3 70.02,43.7 J30.1
N16731430: length 9.2
  TOP w0.2: U3.52 67,43.8 68.9,41.9 J26.1
N16731432: length 8.7
  TOP w0.2: J24.1 70.12,45.5 69.42,44.8 U3.54
N16731538: length 8.7
  TOP w0.2: U3.71 69.2,53.3 69.7,53.8 J14.1
N16731540: length 9.2
  TOP w0.2: J12.1 69.6,55.6 67.8,53.8 U3.72
N16731542: length 9.7
  TOP w0.2: J11.1 69.8,57.4 66.7,54.3 U3.73
N16731544: length 10.8
  TOP w0.2: J10.1 70.02,59.2 69.7,58.88 69.7,58 66.5,54.8 U3.74
N16731602: length 9.3
  TOP w0.2: U3.68 62.6,51.85 63.47,51.85 64.52,52.9 68.7,52.9 69.6,52 J18.1
N16731606: length 9.9
  TOP w0.2: U3.67 63.49,51.3 64.69,52.5 67.6,52.5 69.9,50.2 J20.1
N16731796: length 7.6
  TOP w0.2: J16.1 41.08,53.8 42.58,52.3 U3.7
N16731798: length 8.6
  TOP w0.2: J13.1 41.7,57.4 45.8,53.3 U3.5
N16731800: length 7
  TOP w0.2: J17.1 41.08,52 41.28,51.8 U3.8
N16731802: length 8.1
  TOP w0.2: U3.6 44.25,52.8 41.45,55.6 J15.1
N16731804: length 7.4
  TOP w0.2: U3.9 42.18,51.3 41.08,50.2 J19.1
N16731818: length 9.7
  TOP w0.2: U3.31 51.3,40.4 51.35,40.35 51.35,40.1 51.3,40.05 51.3,38.2 49.1,36 47.32,36 47,35.68 J46.1
N16732022: length 9.5
  TOP w0.2: U3.48 59.8,39 60.1,38.7 64.18,38.7 65.2,37.68 J53.1
N16732024: length 7.1
  TOP w0.2: U3.46 58.8,38.5 59.5,37.8 61.4,37.8 61.6,37.6 J51.1
N16732026: length 10.6
  TOP w0.2: J54.1 67,37.68 65.58,39.1 60.5,39.1 60.3,39.3 U3.49
N16732028: length 8.4
  TOP w0.2: U3.47 59.3,38.7 59.8,38.2 62.88,38.2 63.4,37.68 J52.1
N16732030: length 5.5
  TOP w0.2: U3.45 58.3,38.2 J50.1
N16732201: length 8.1
  TOP w0.2: J47.1 49.3,35.58 51.7,37.98 51.7,39.88 52.3,40.48 U3.33
N16732205: length 7.7
  TOP w0.2: J48.1 51.6,37.2 52.1,37.7 52.1,39.71 52.84,40.45 53.07,40.45 53.25,40.63 53.25,41.5 U3.35
N16732209: length 8.1
  TOP w0.2: J49.1 53.9,35.7 52.5,37.1 52.5,37.53 52.5,37.53 52.5,39.55 52.96,40.01 53.2,40.01 53.8,40.61 U3.36
N16736296: length 7.5
  TOP w0.2: J6.1 53.7,62.9 51.8,61 U3.94
